# Altium PCB SoM.PcbDoc (part 1 of 5)
Units mm, origin at the board's own origin, x right, y up, seen from the top; angles counter-clockwise.
Board outline 69.6 x 50 mm, 8 copper layers ([1] Signal HS-H, [2] GND, [3] Signal HS-V, [4] GND, [5] POWER, [6] Signal H, [7] GND, [8] Signal V), stack 1.601 mm thick; 537 components, 538 nets, 5734 pads, 0 vias.
Unrouted connection lines stored in the file: 2195.
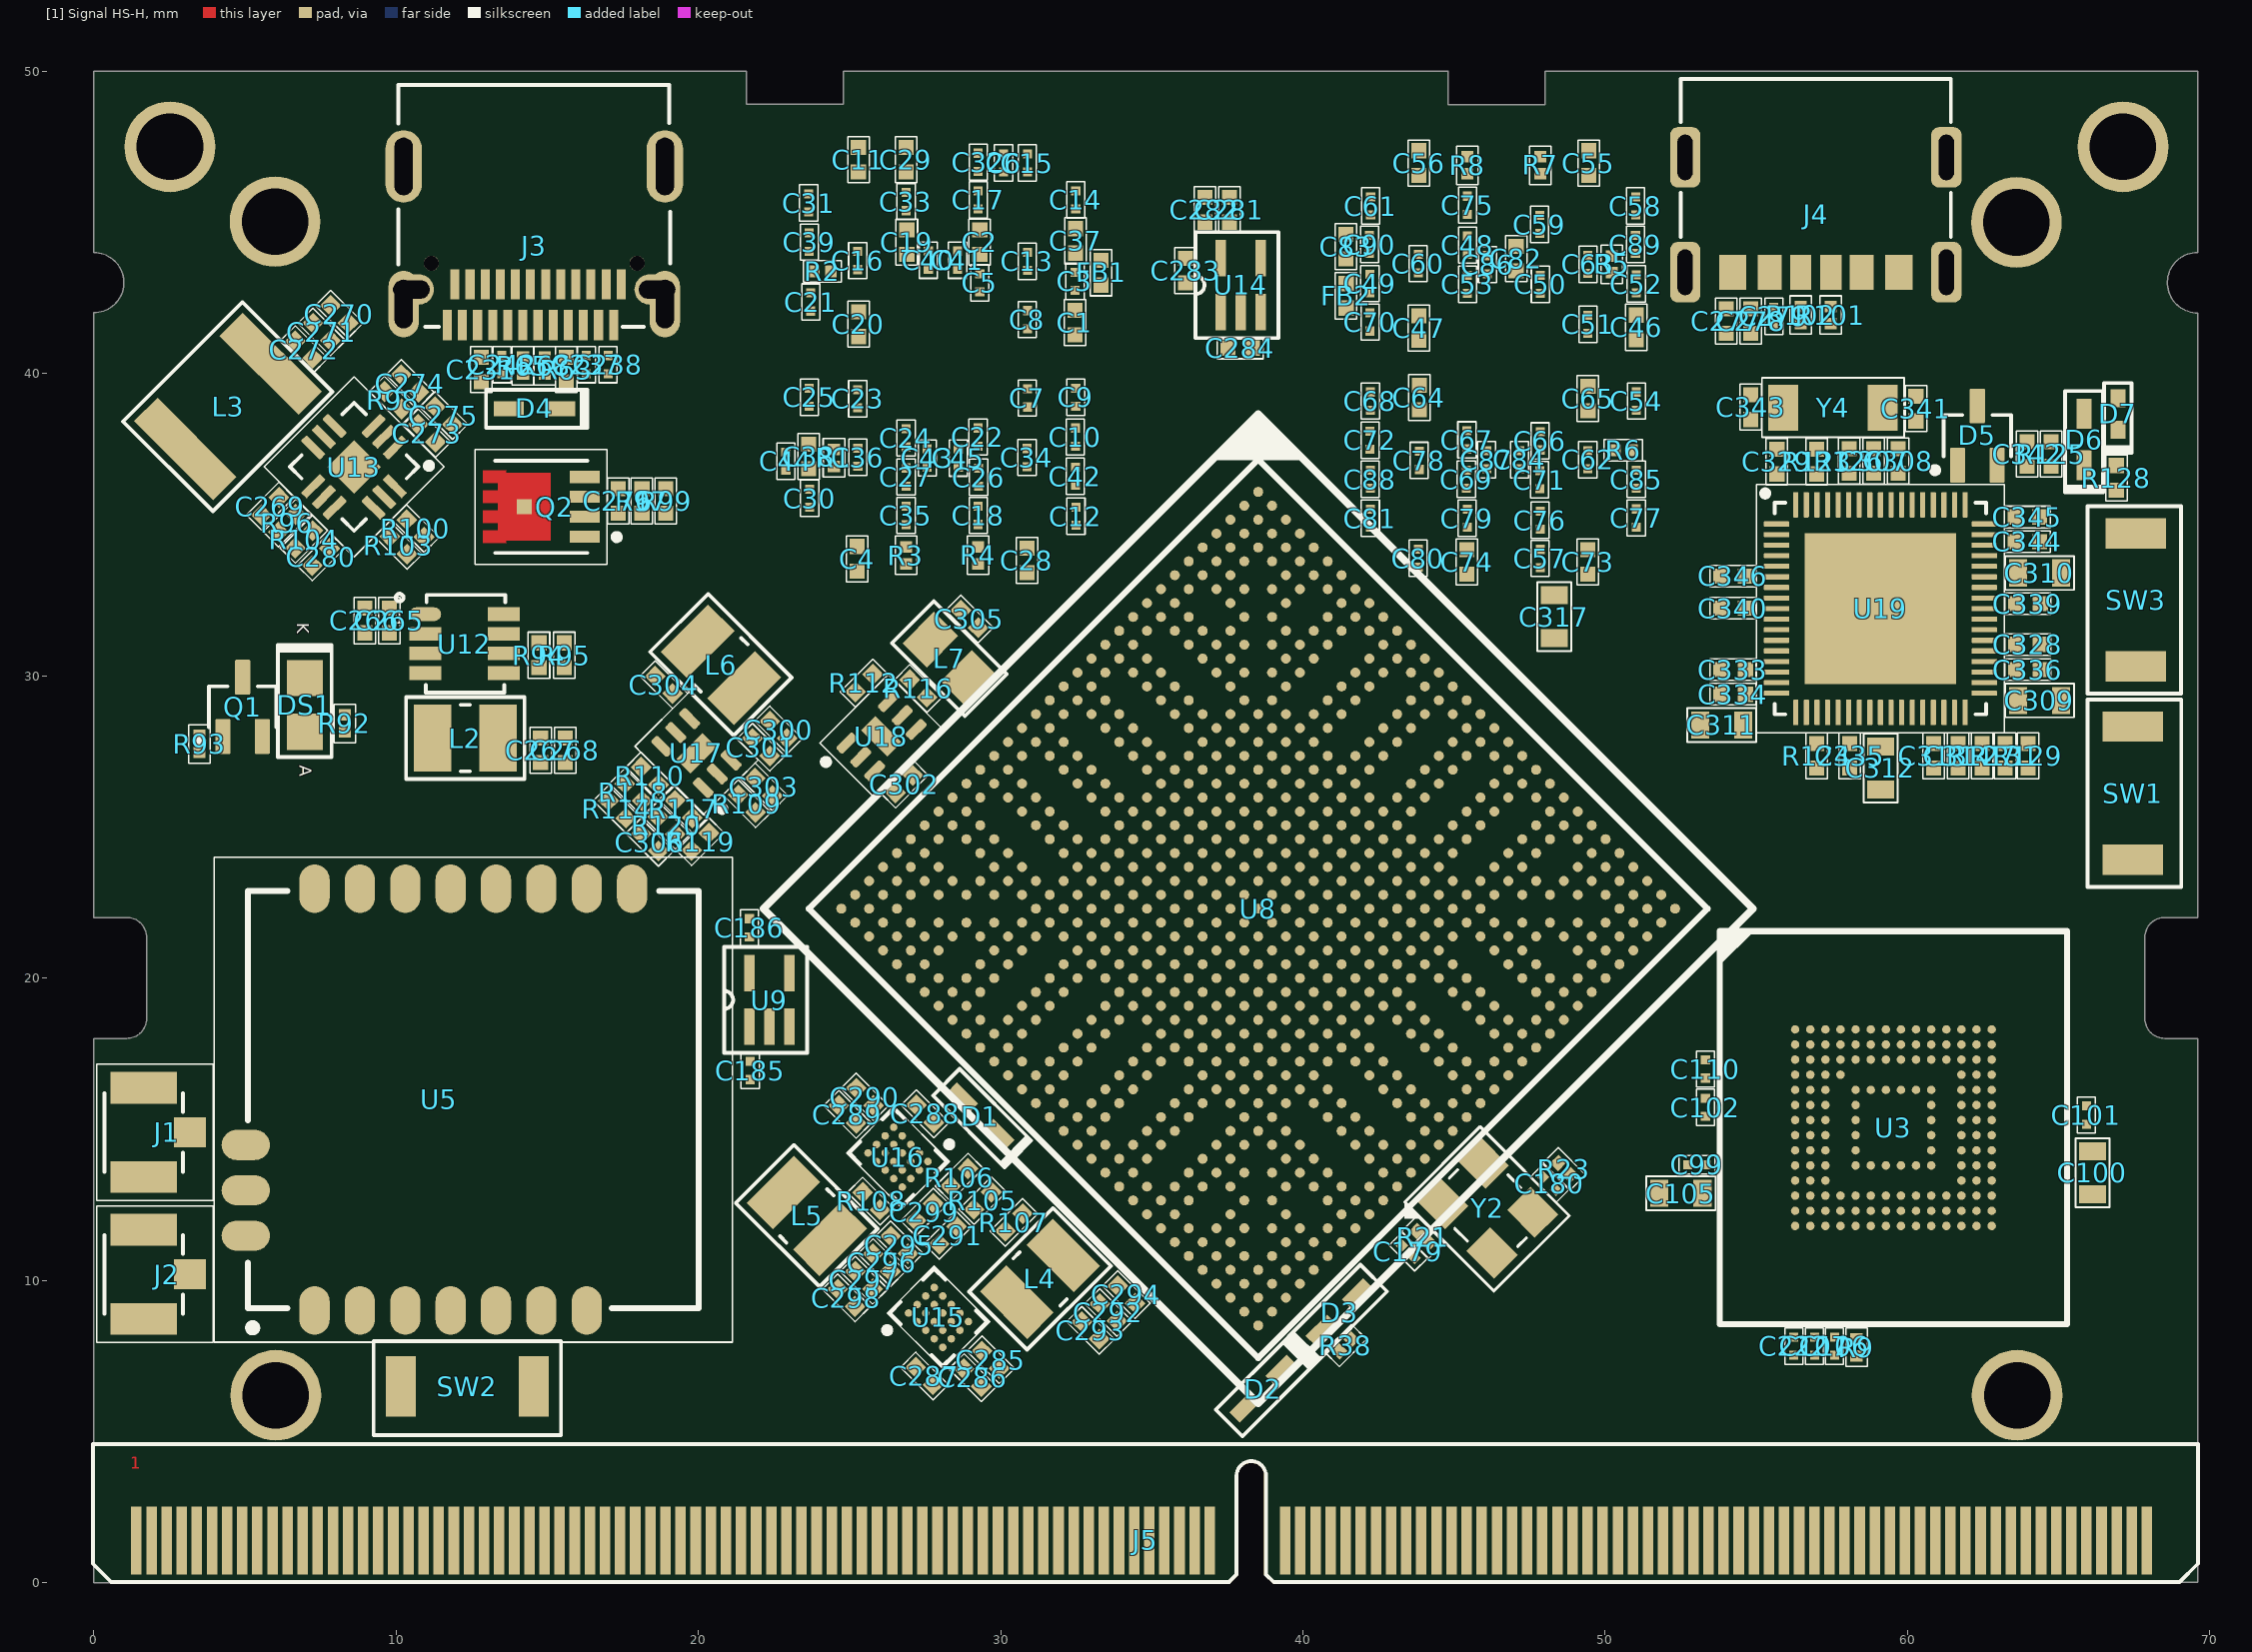
[diagram p0: [1] Signal HS-H view]
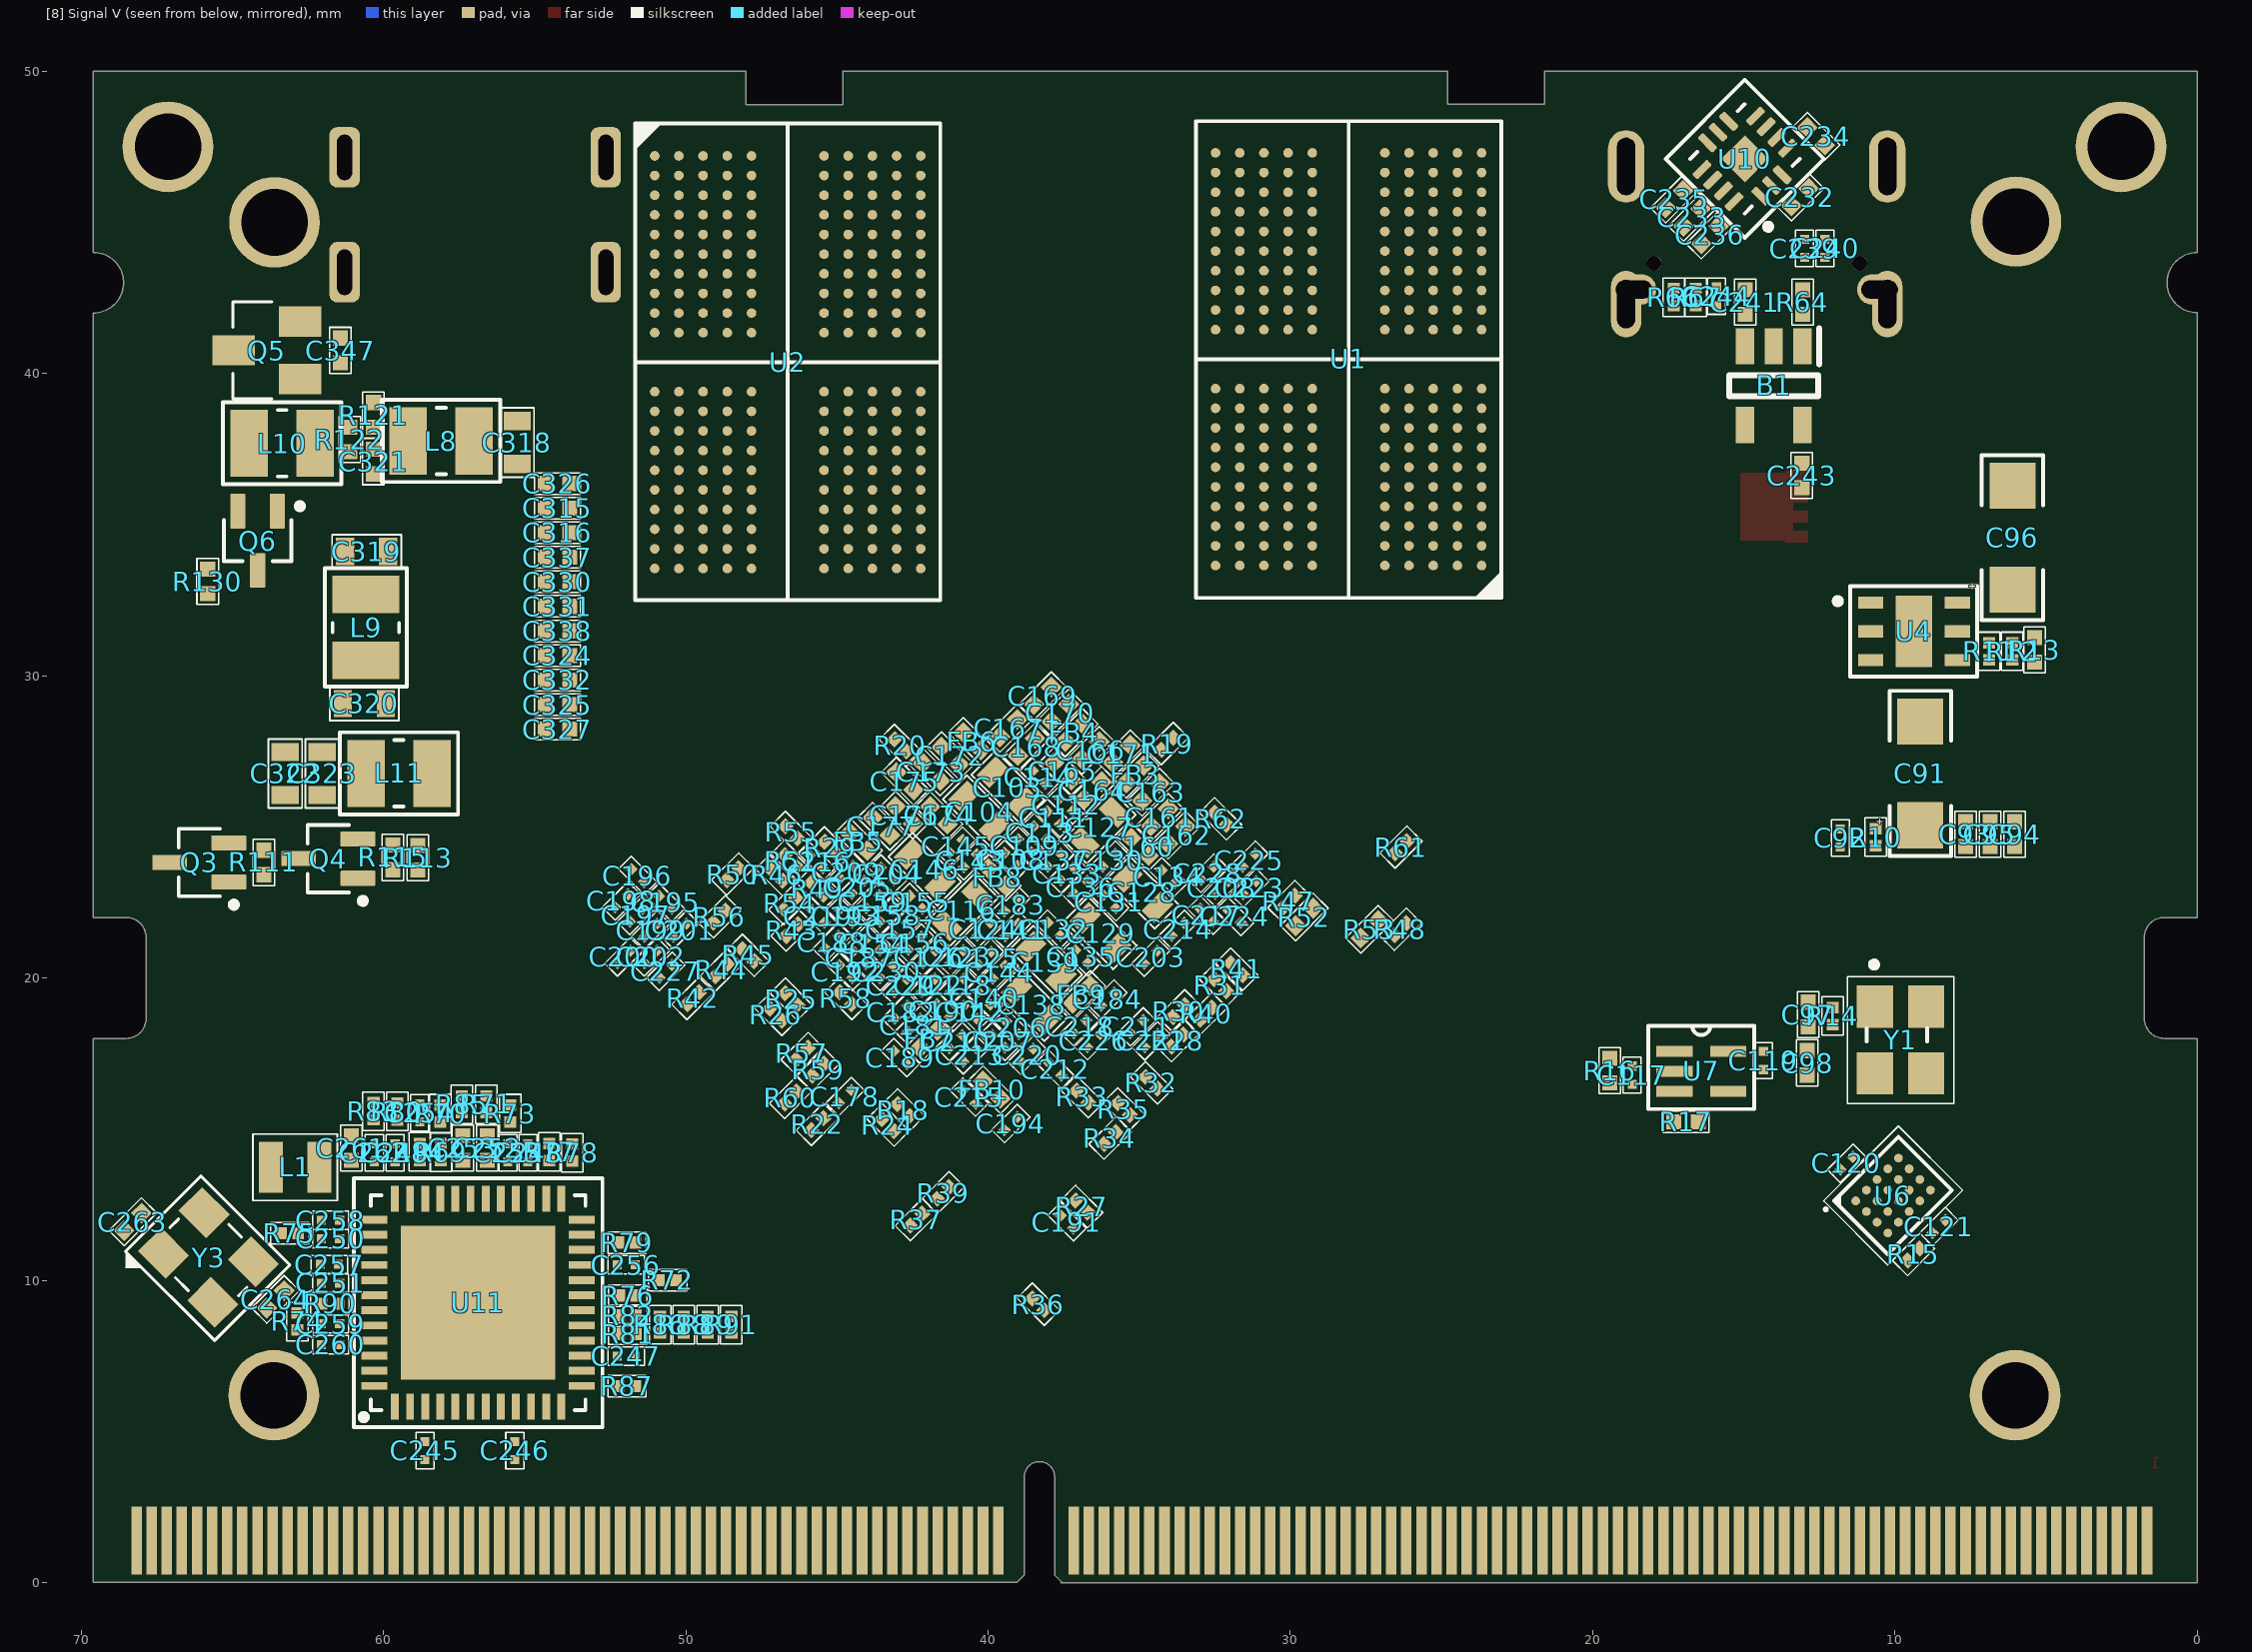
[diagram p1: [8] Signal V view, seen from below]
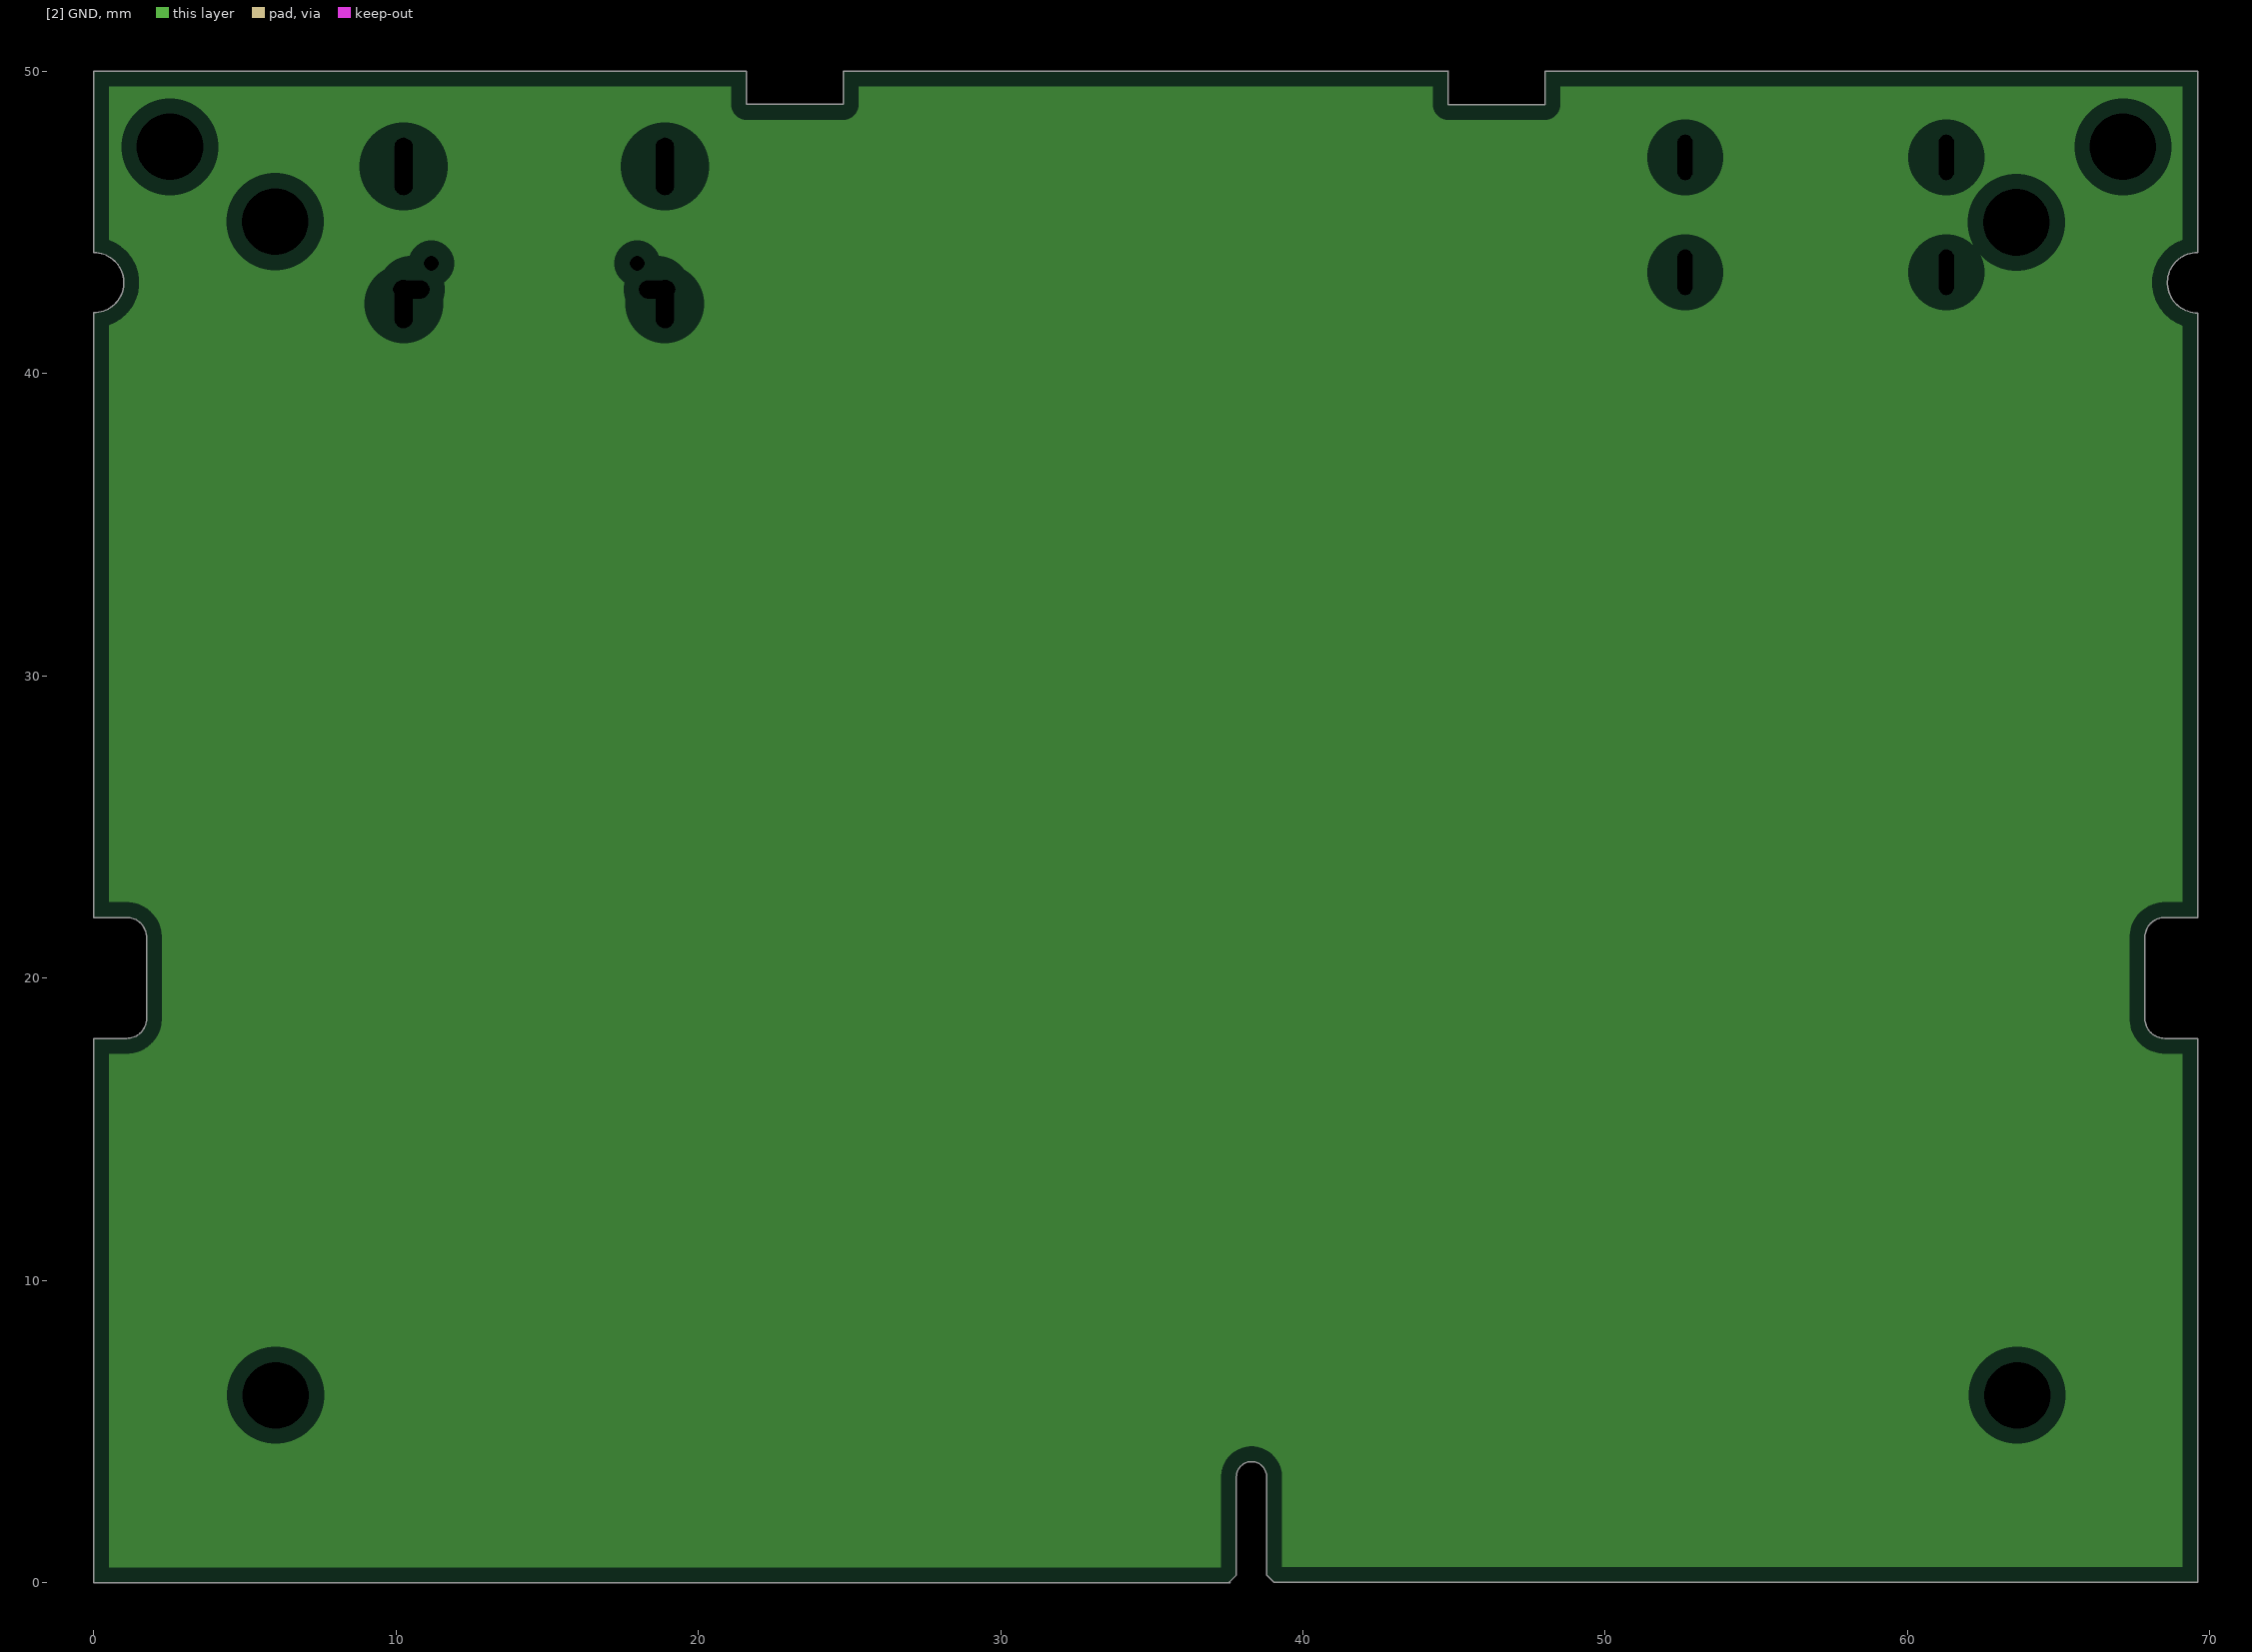
[diagram p2: [2] GND, clearances drawn from the general rule]
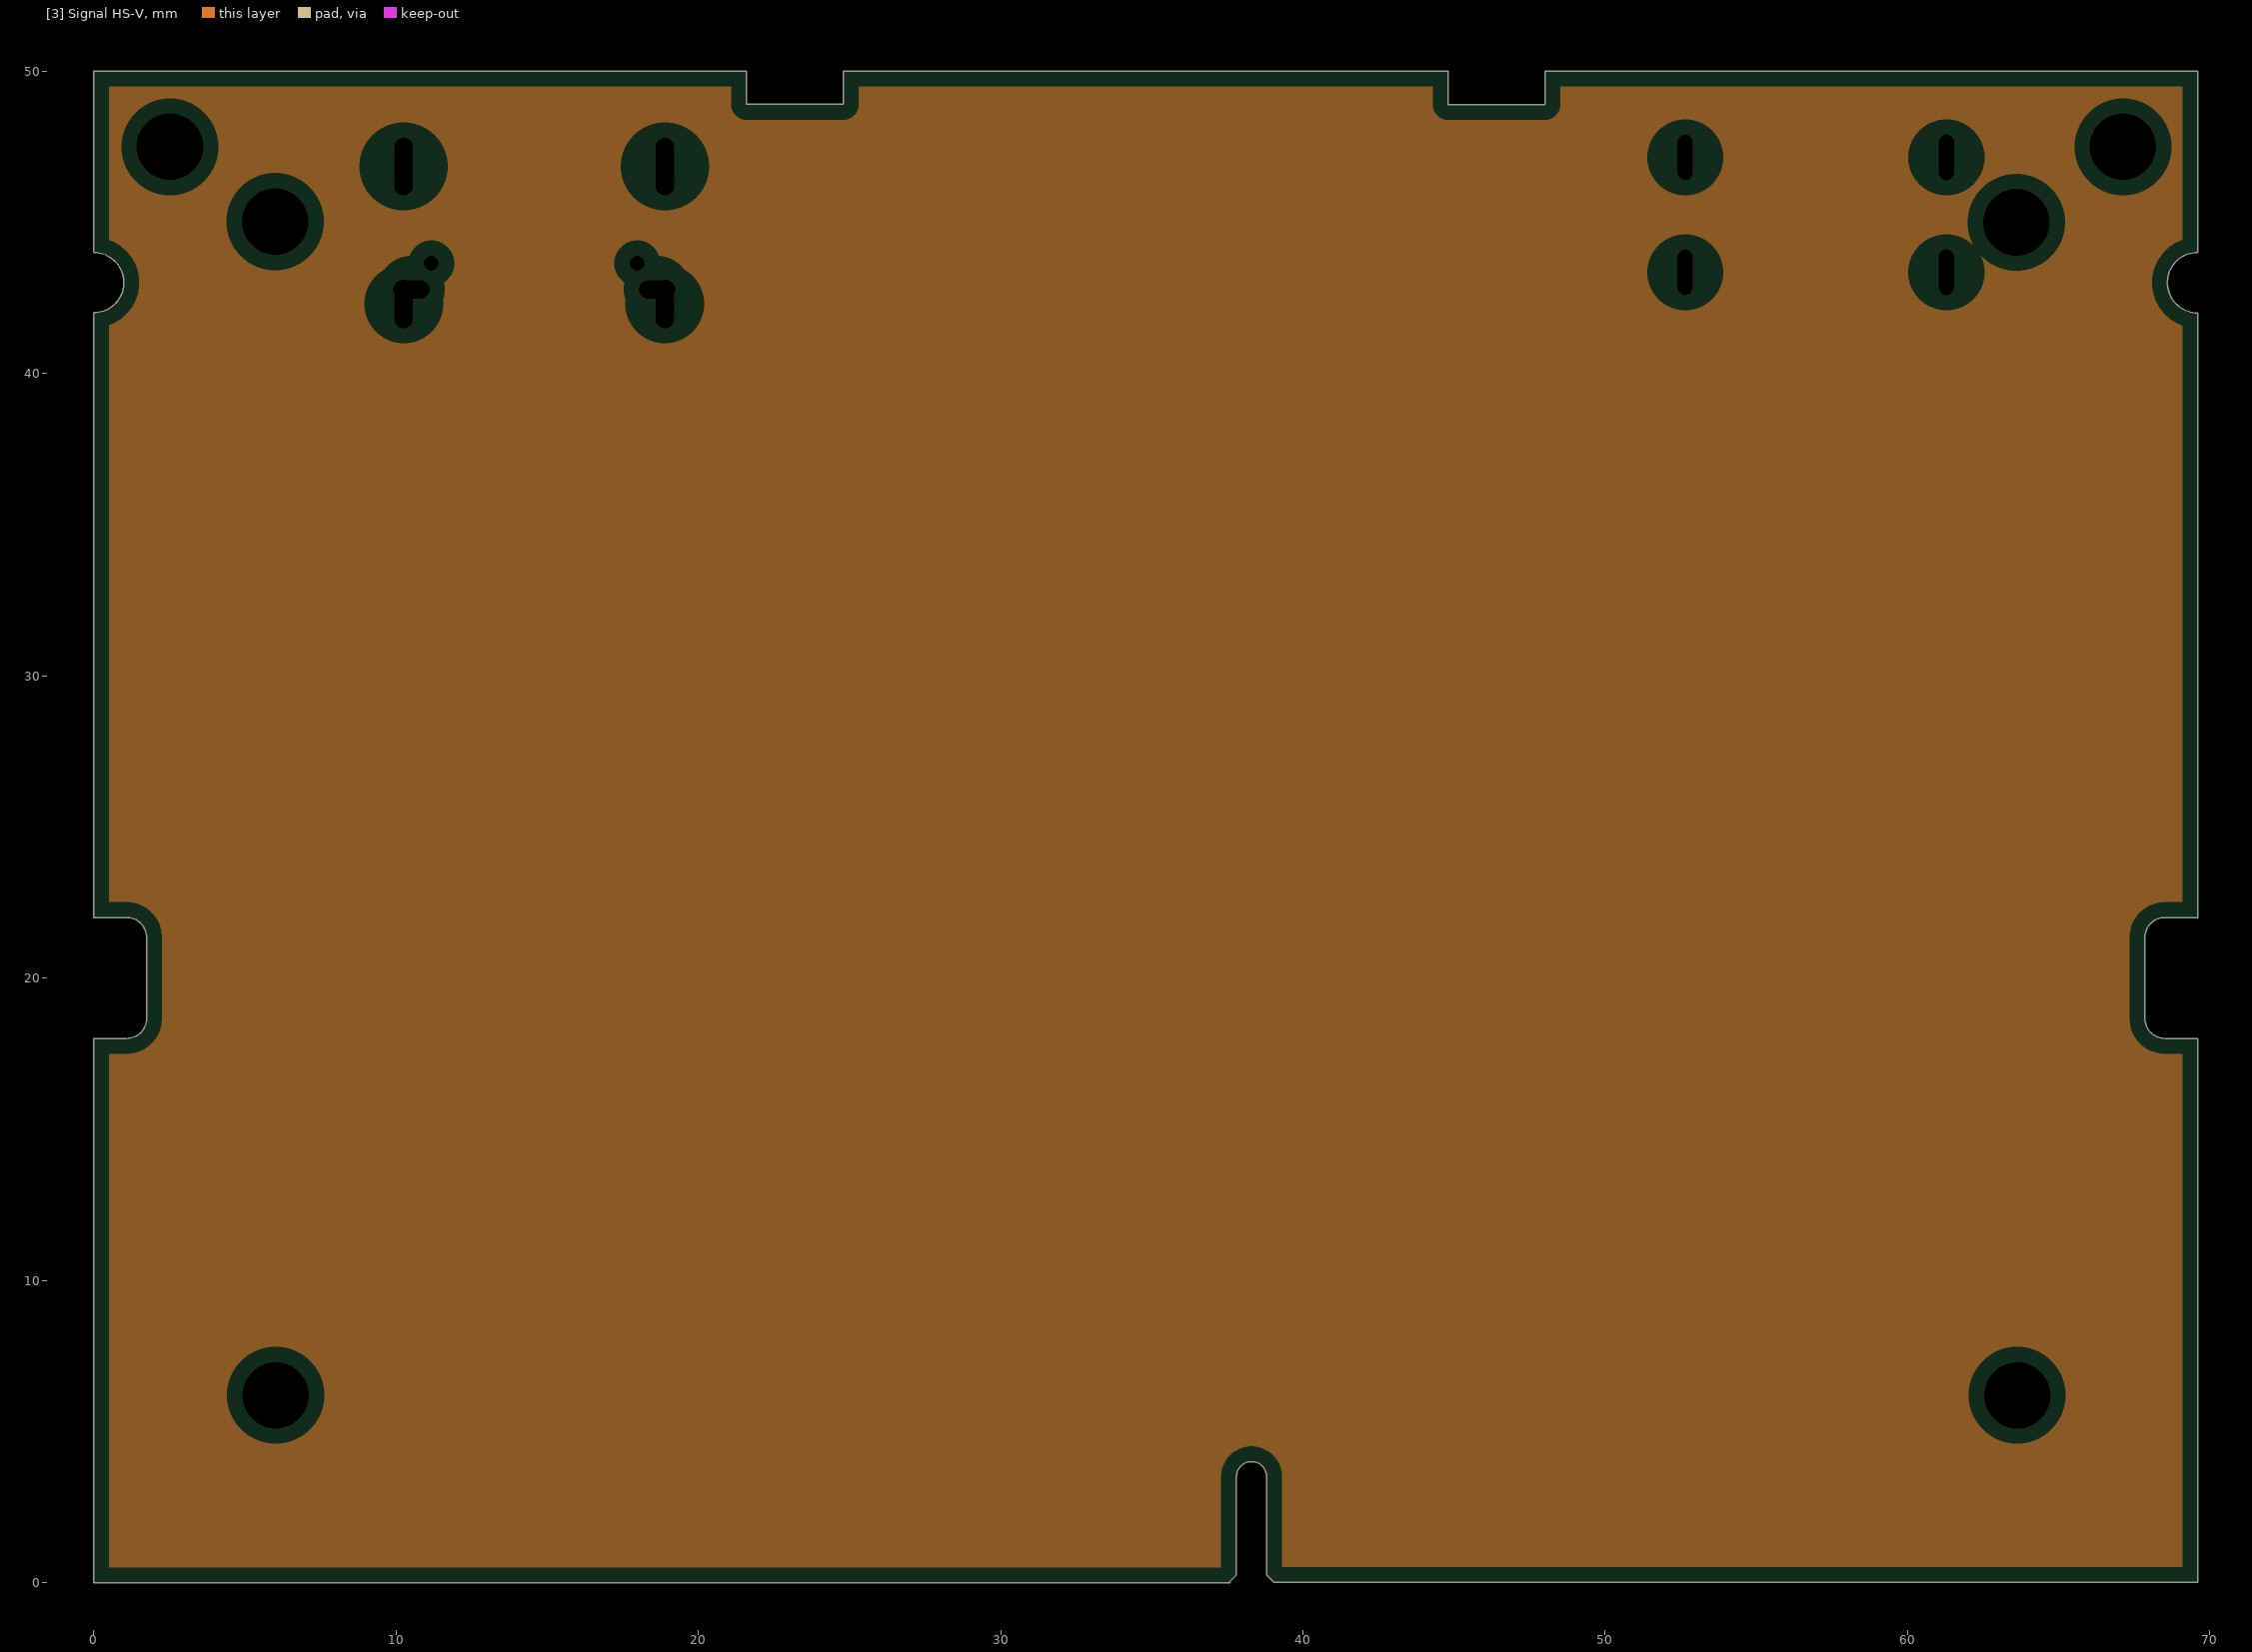
[diagram p3: [3] Signal HS-V, clearances drawn from the general rule]
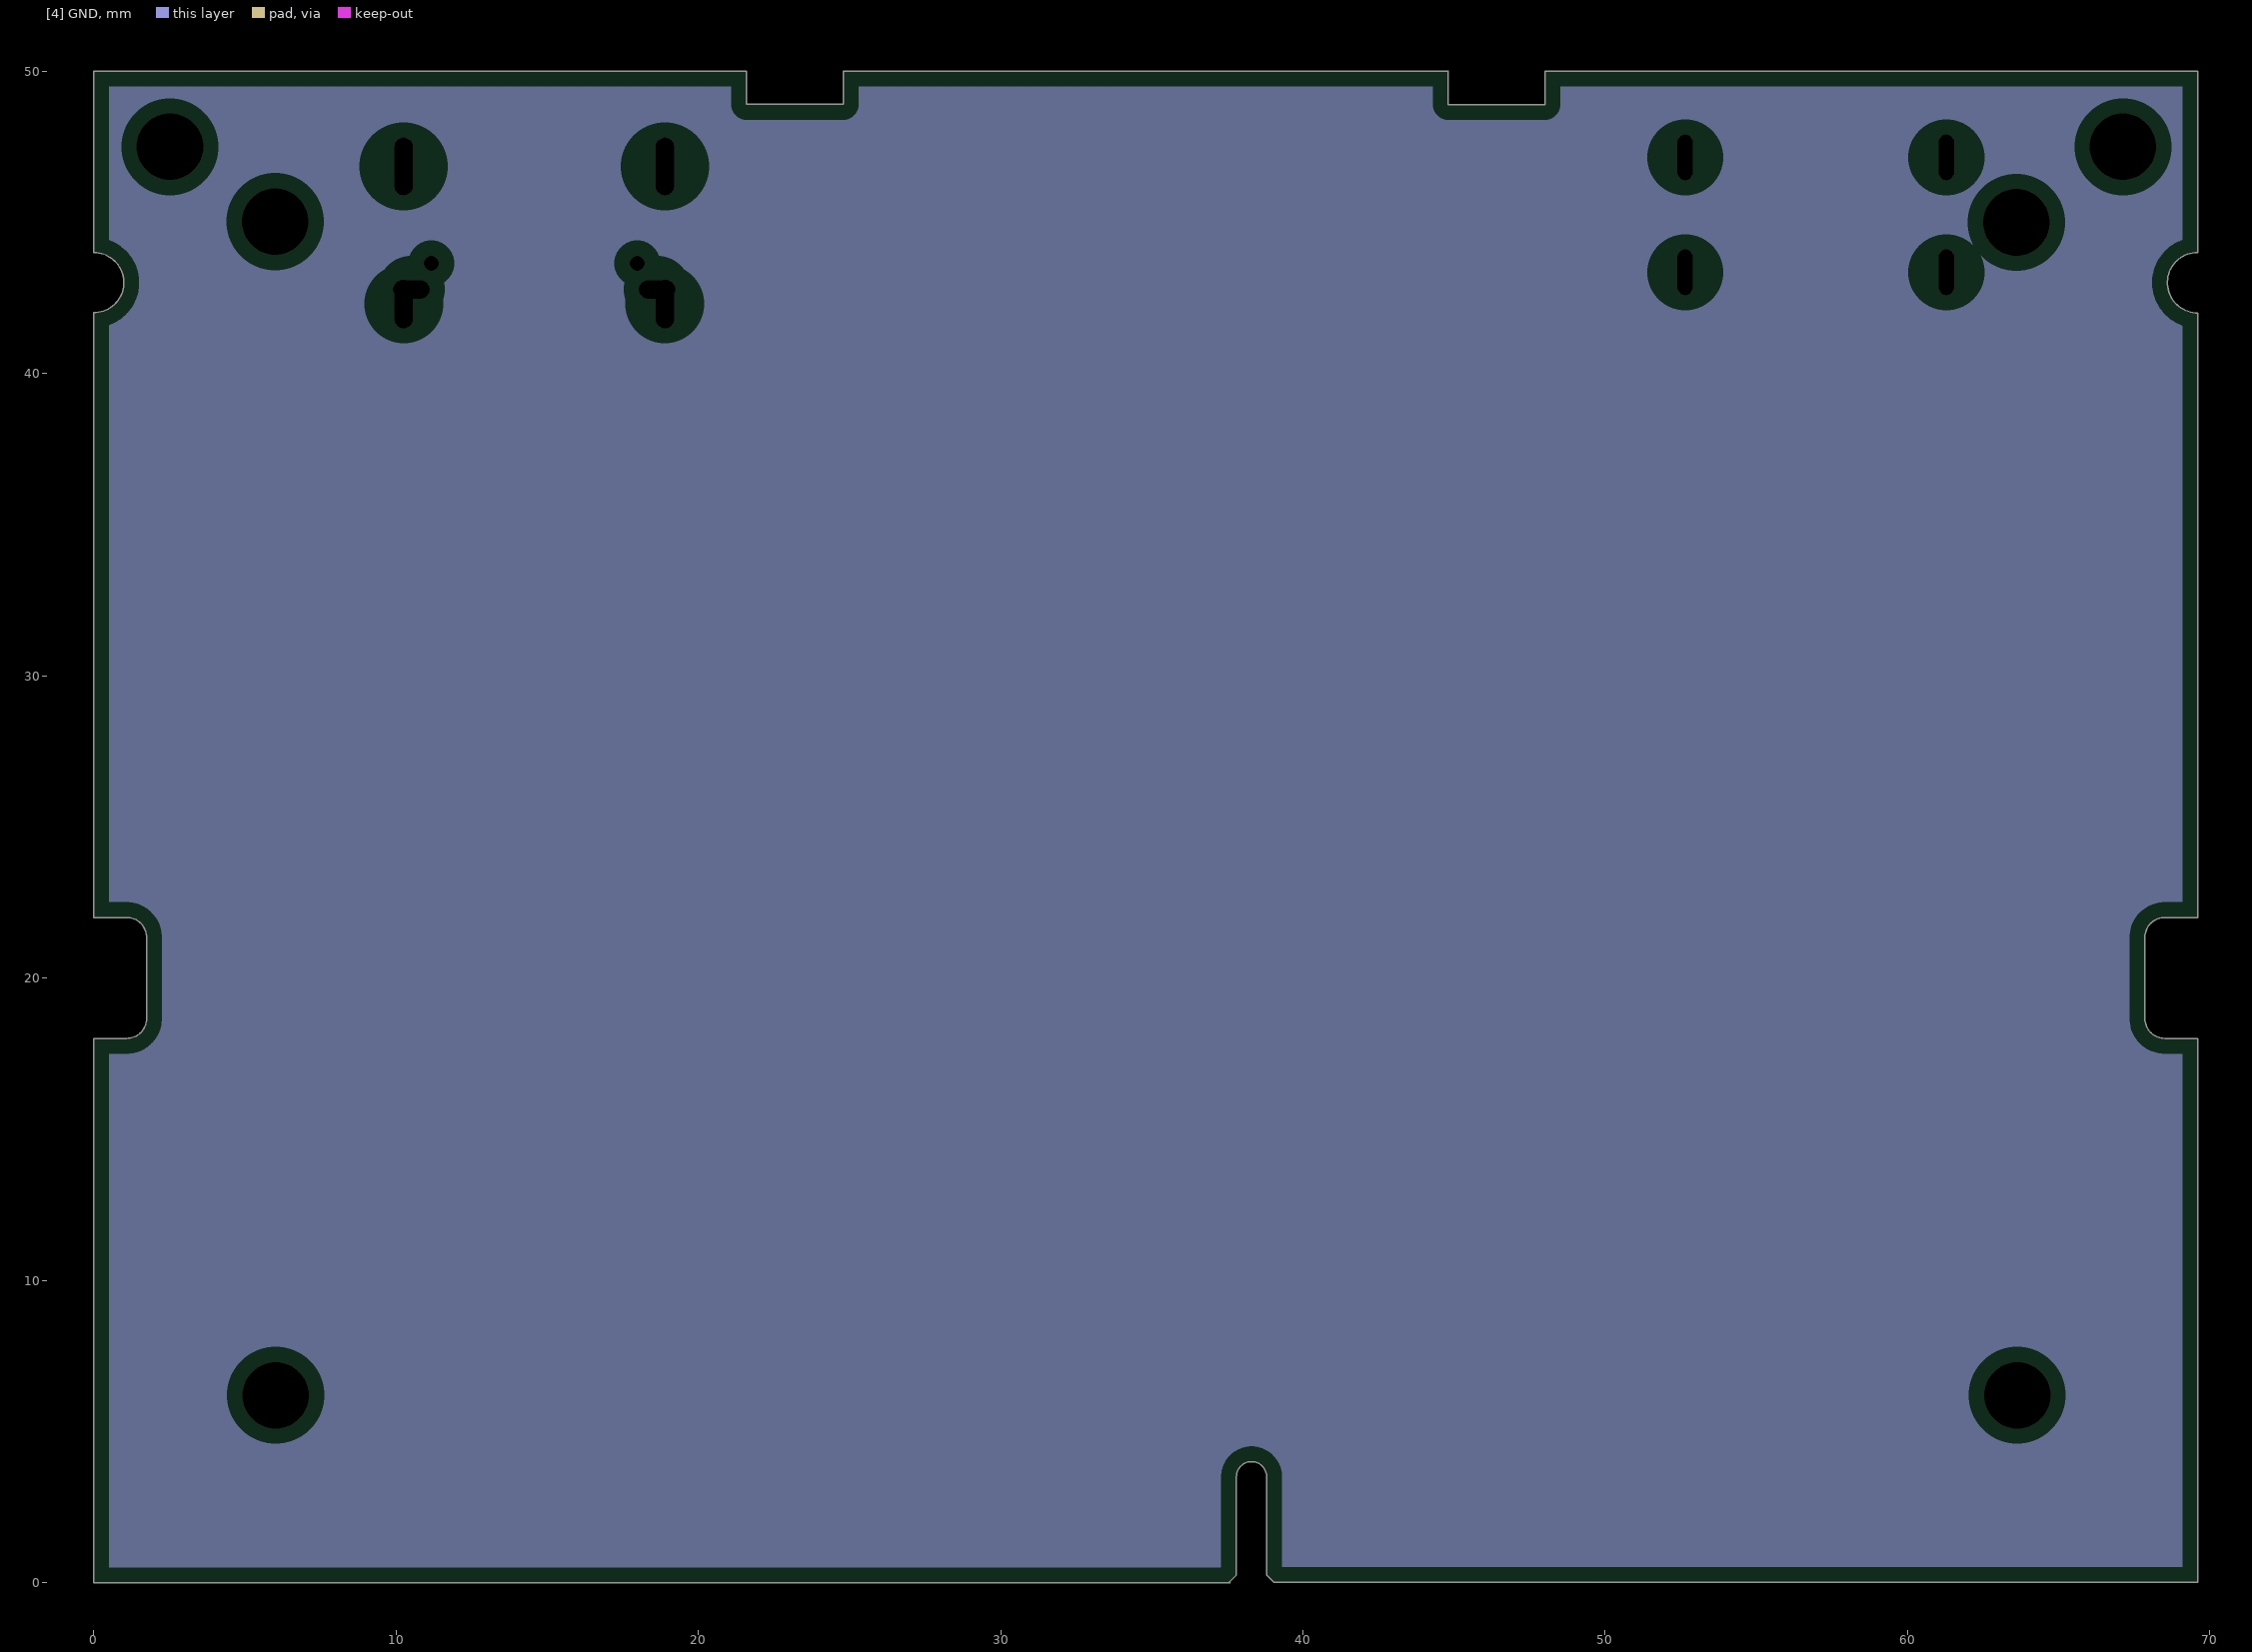
[diagram p4: [4] GND, clearances drawn from the general rule]
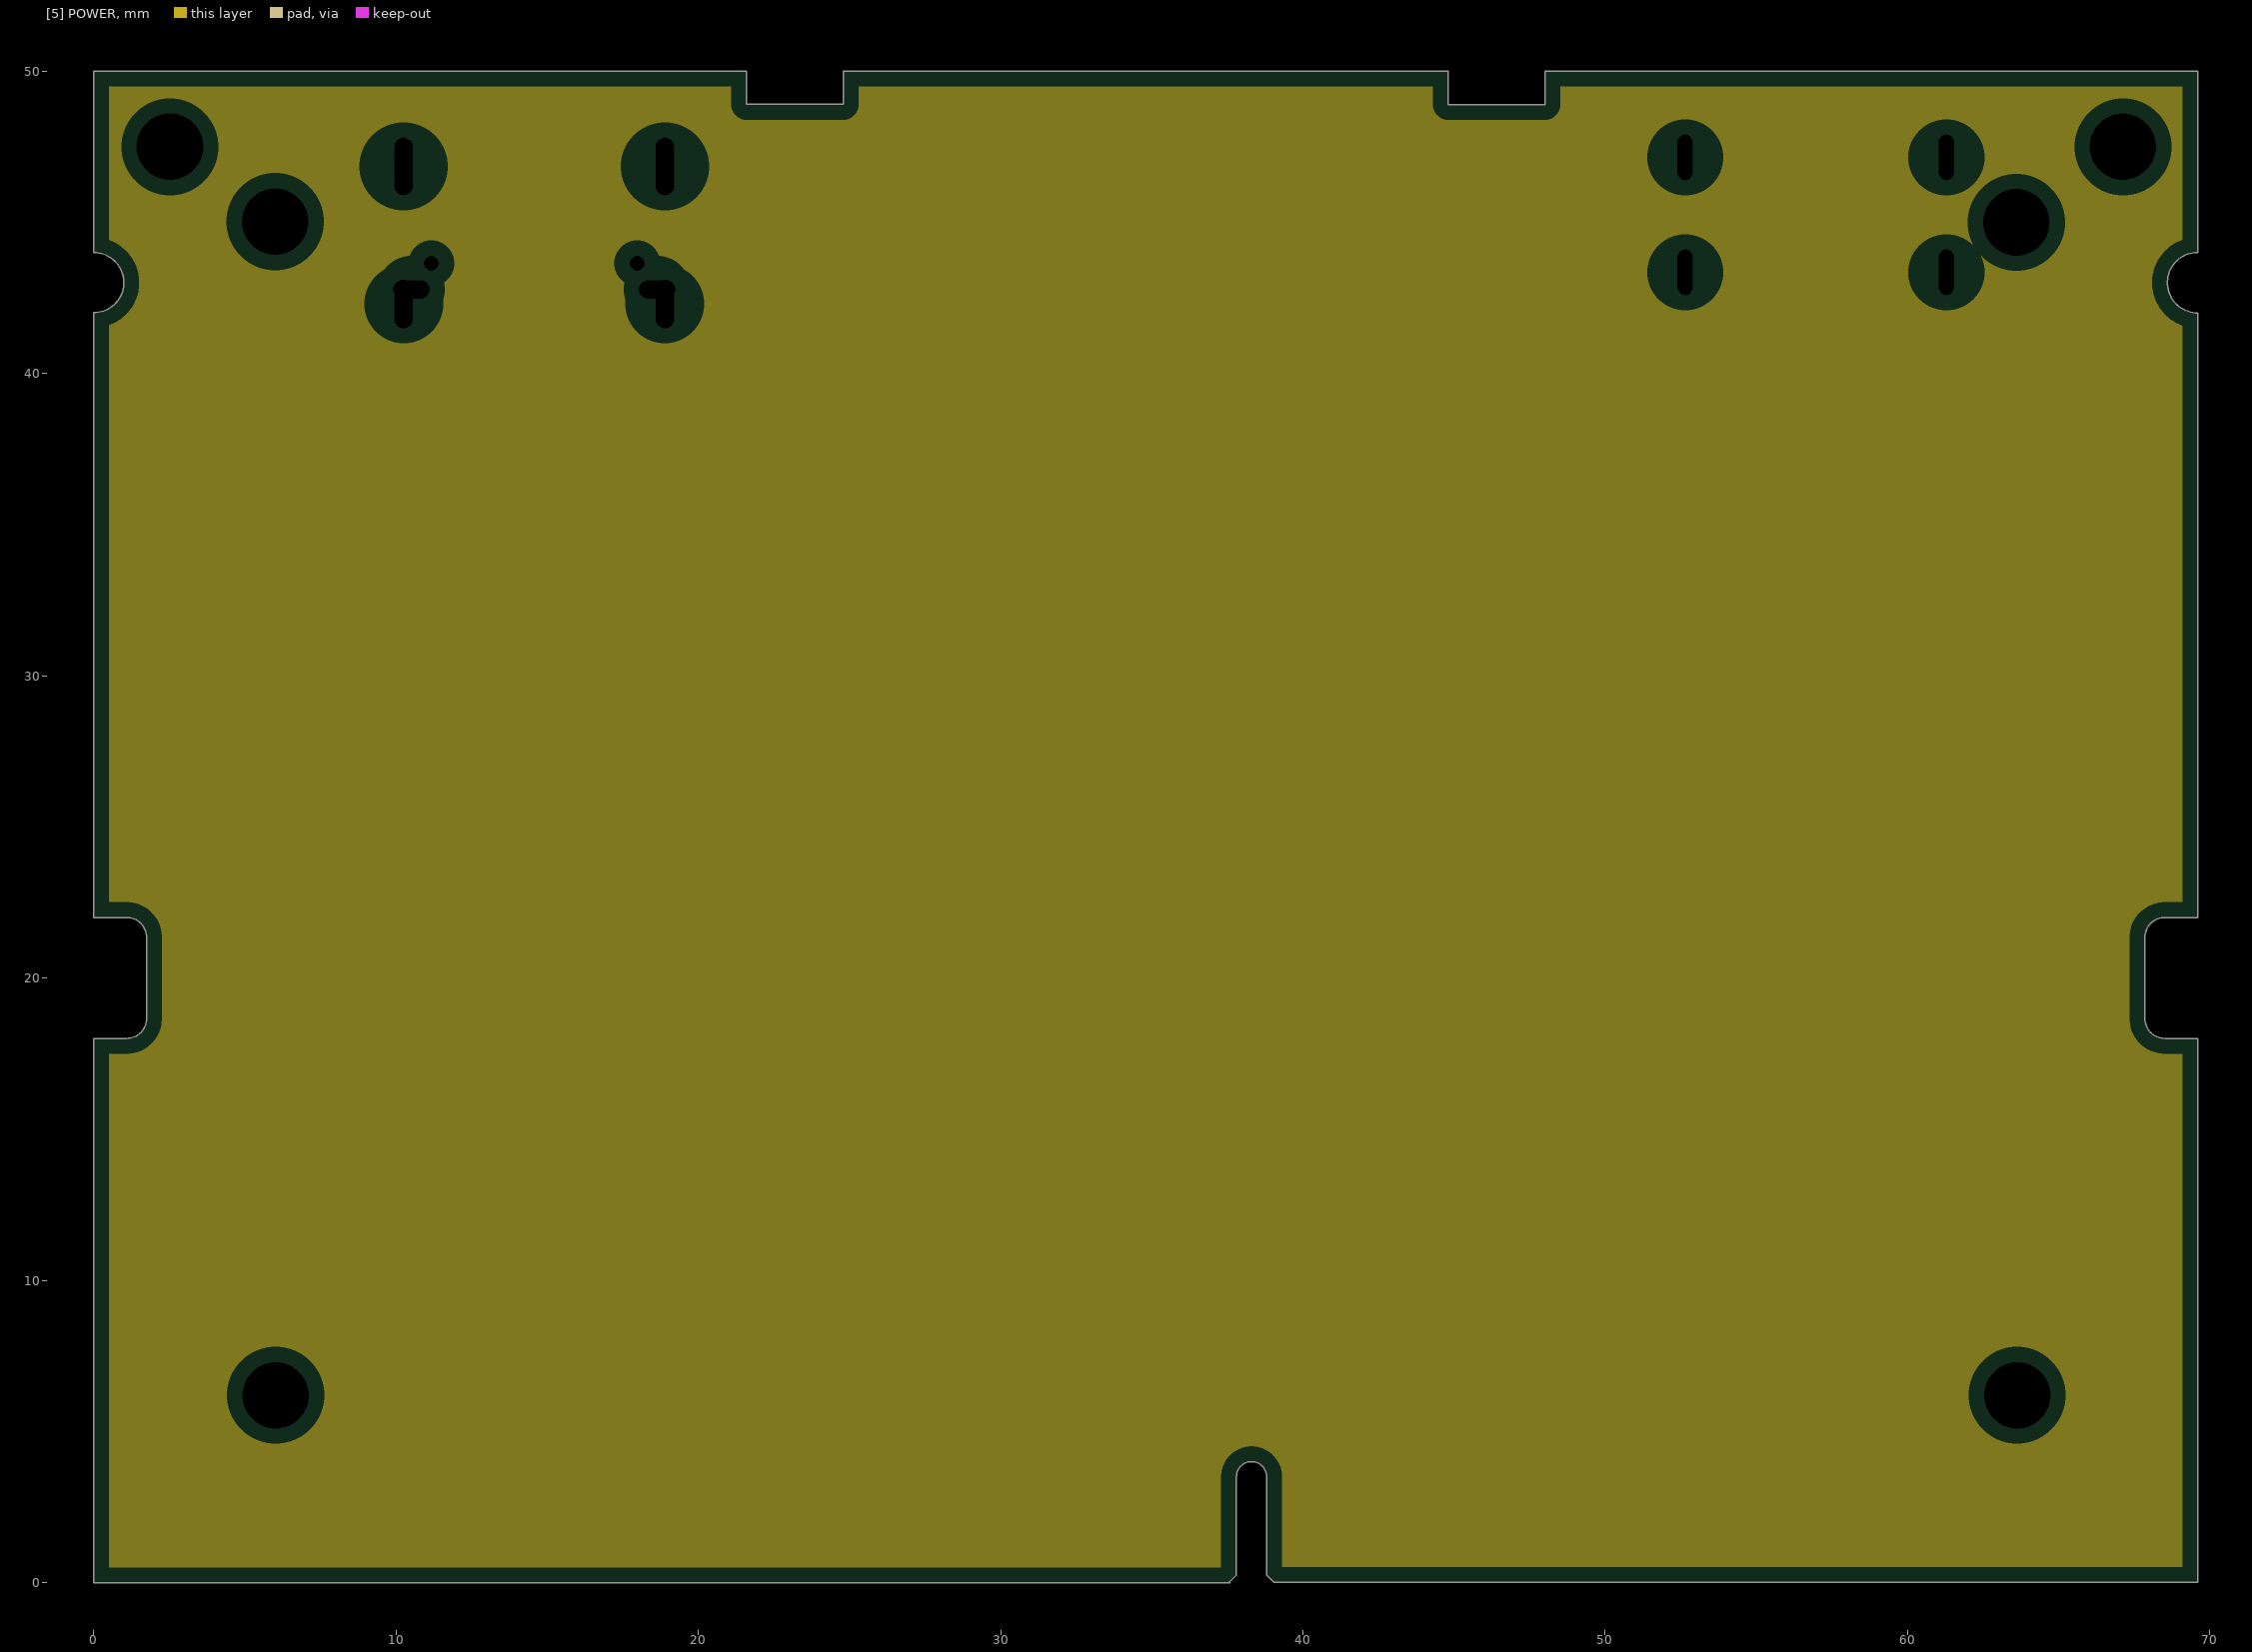
[diagram p5: [5] POWER, clearances drawn from the general rule]
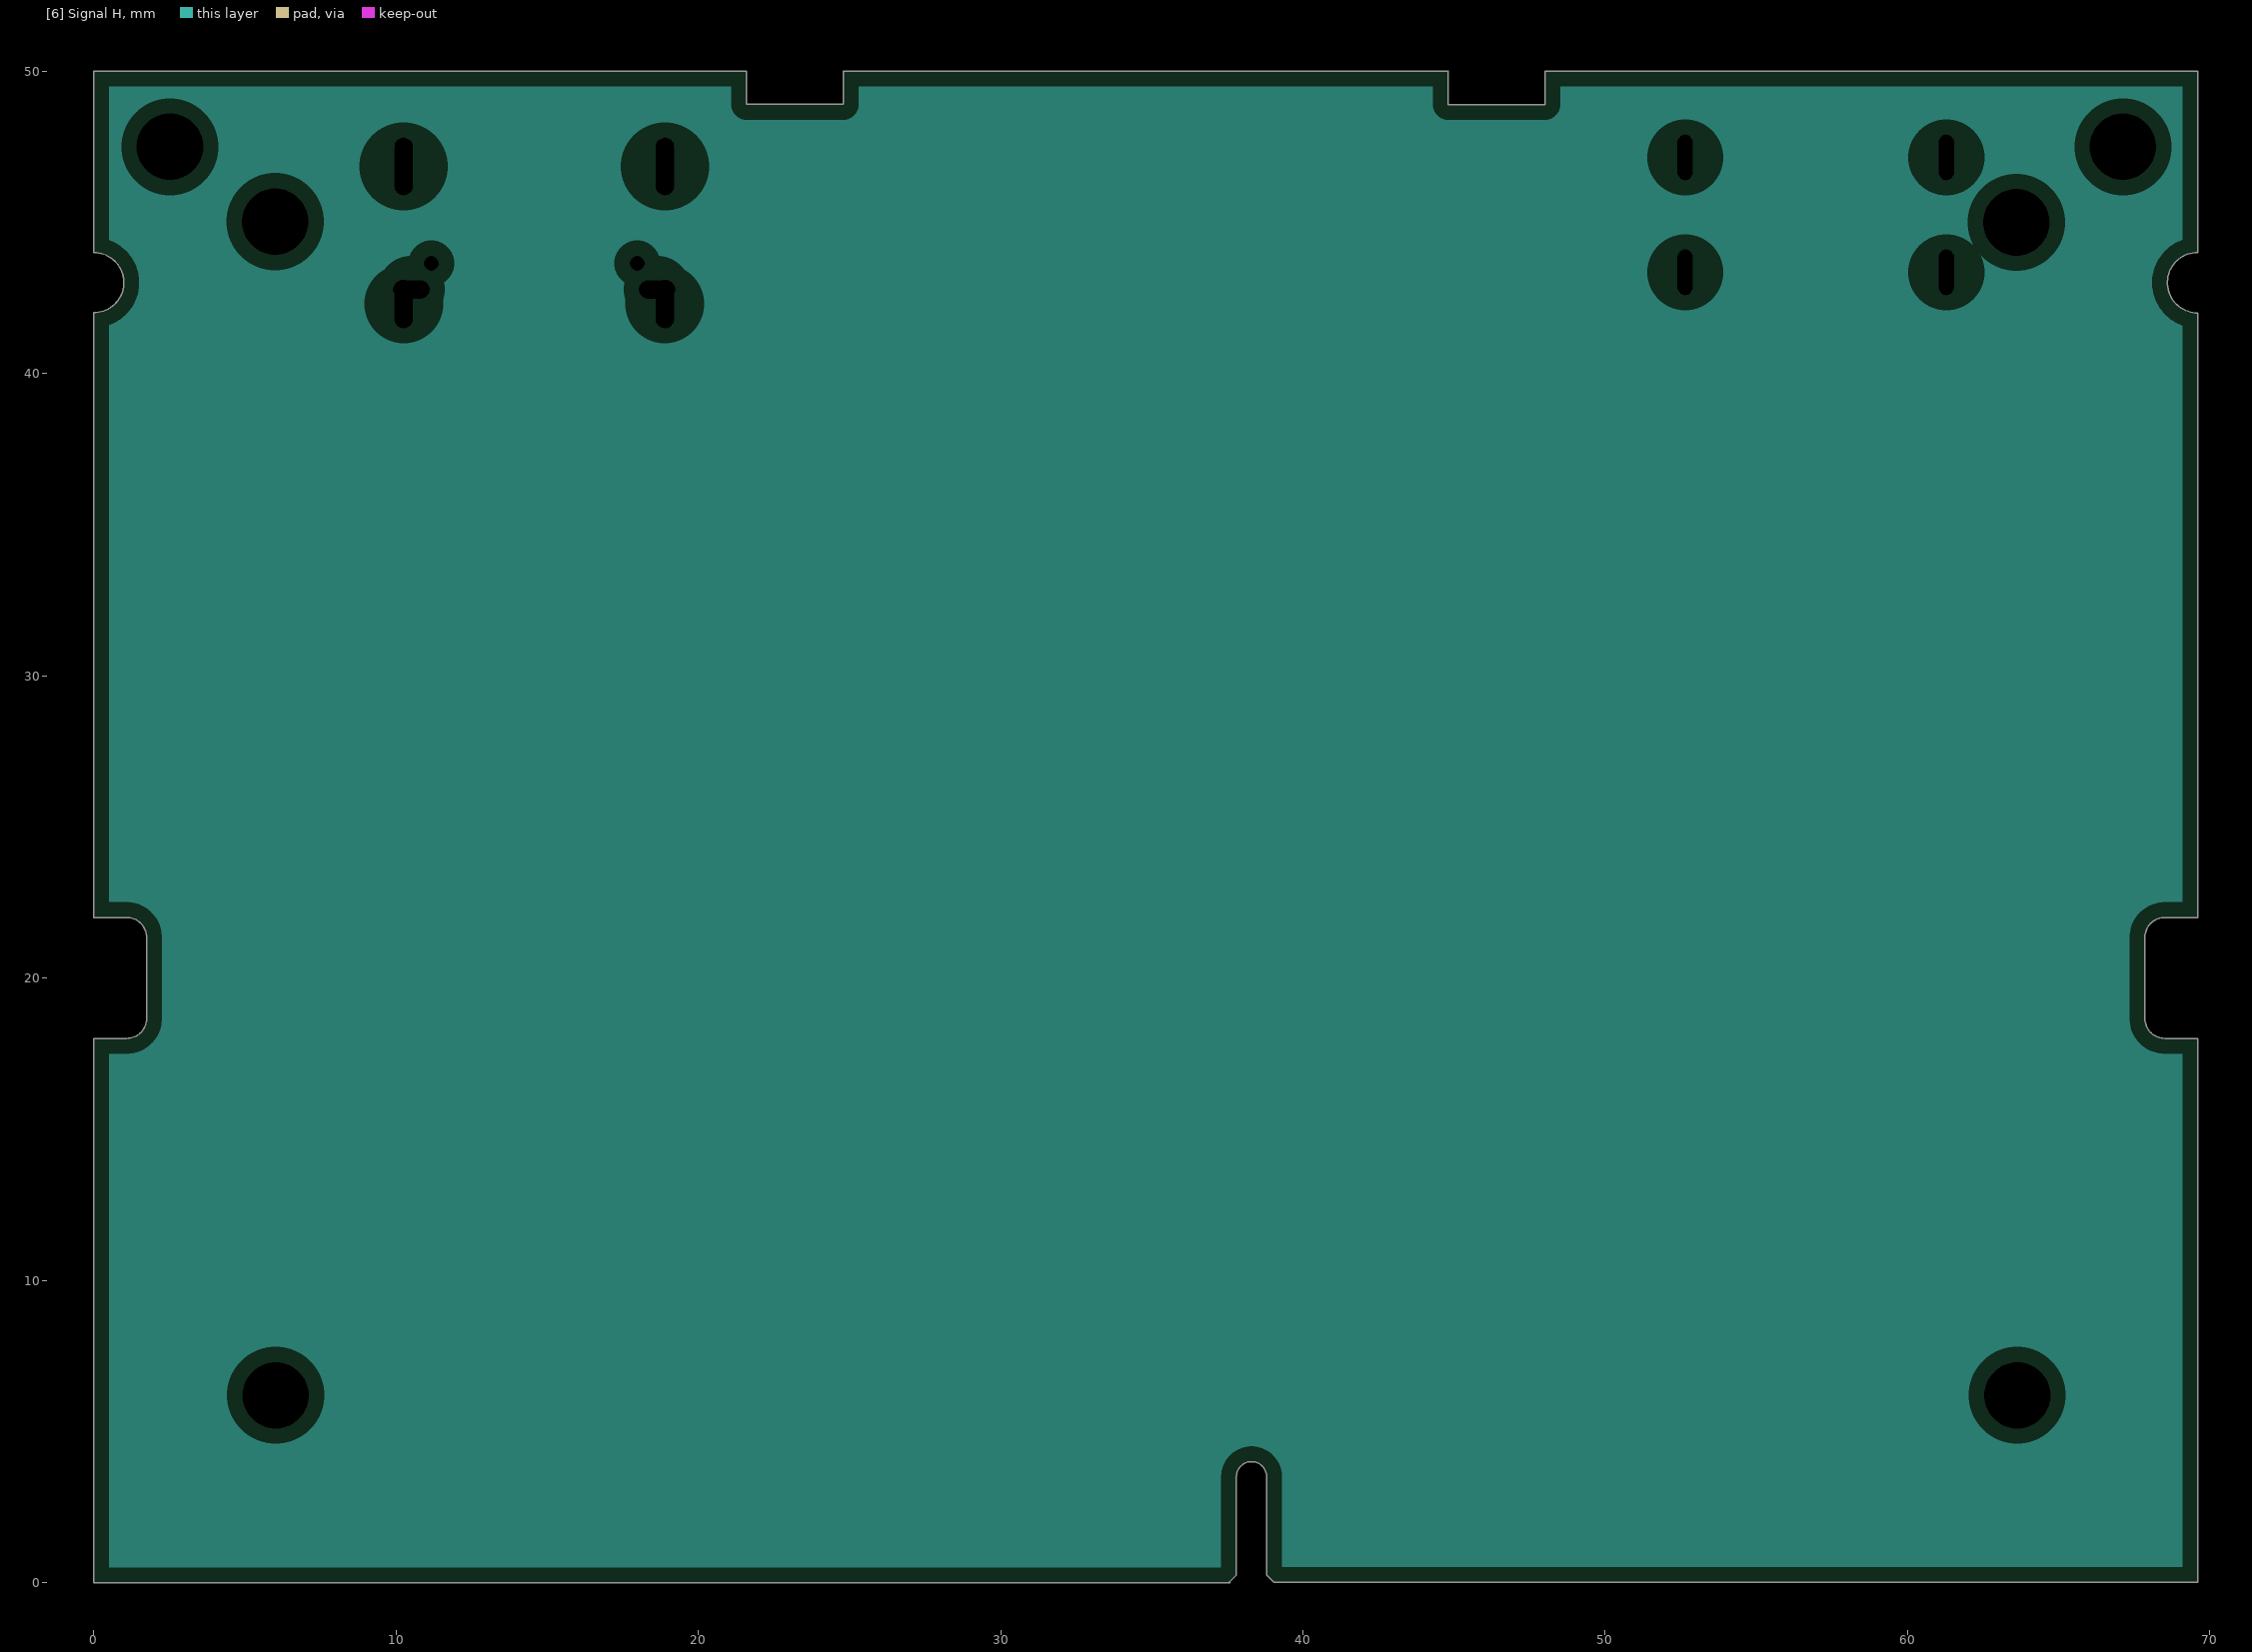
[diagram p6: [6] Signal H, clearances drawn from the general rule]
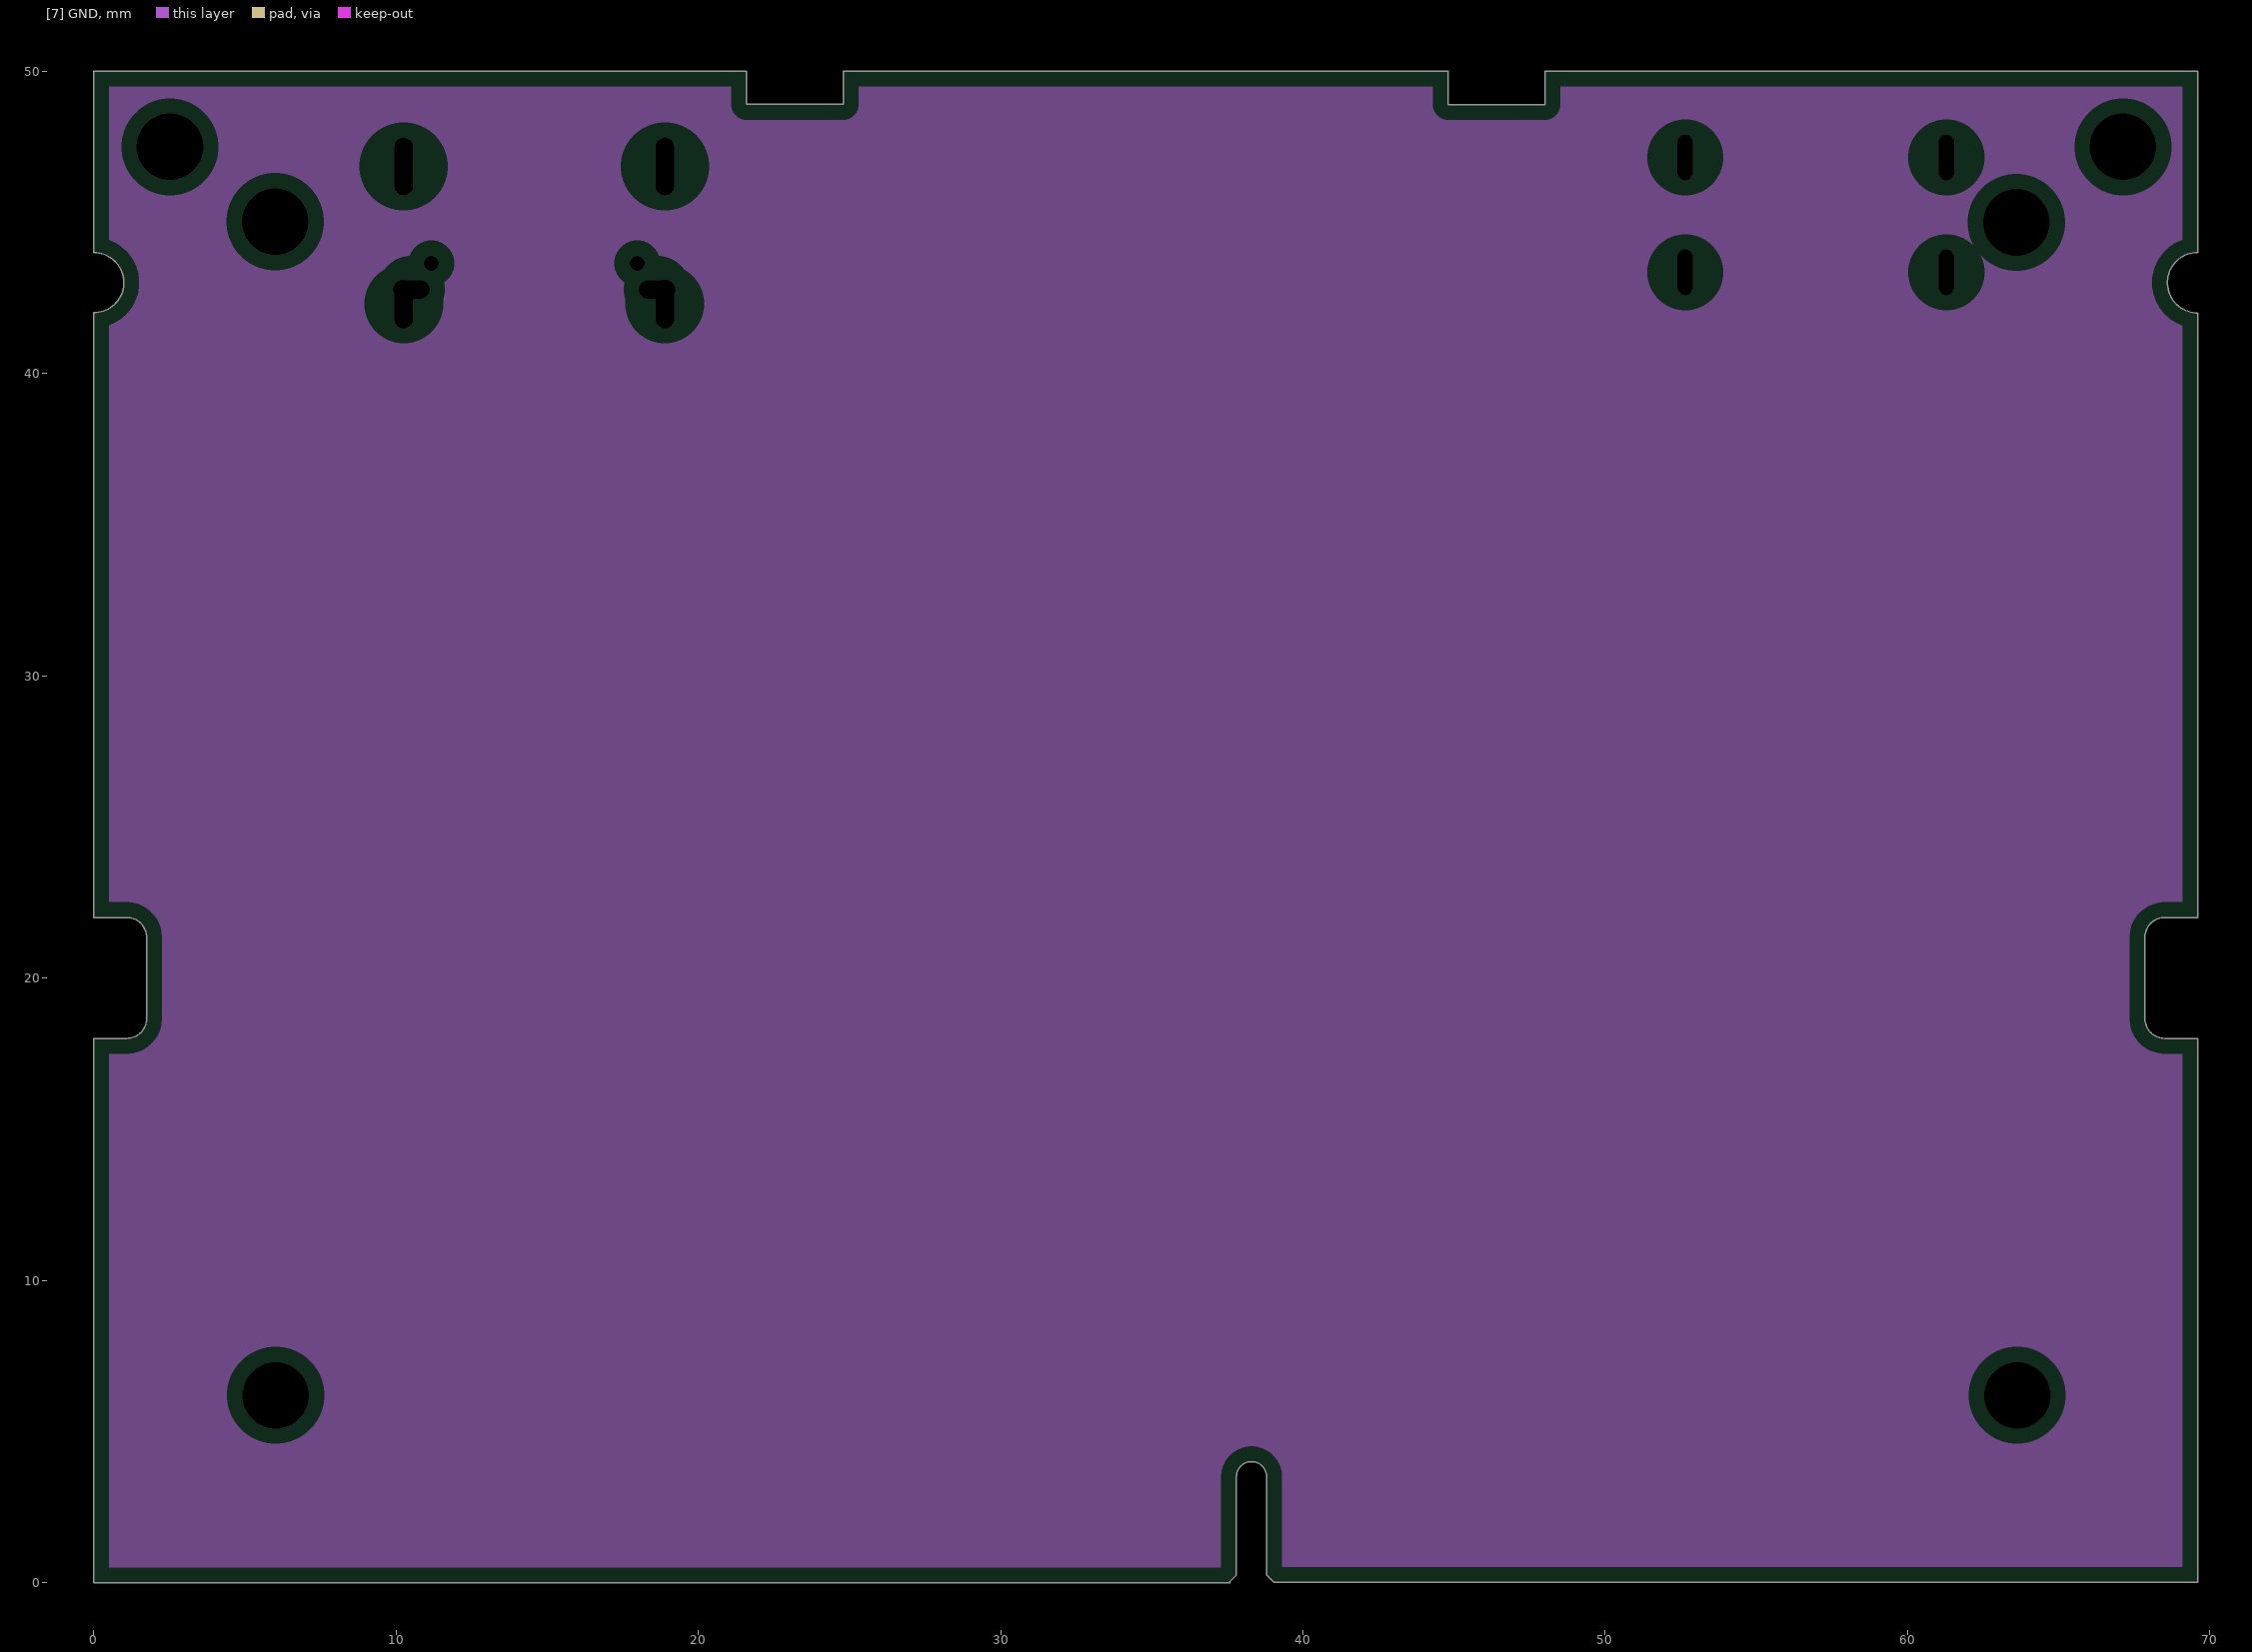
[diagram p7: [7] GND, clearances drawn from the general rule]

## Layer stack, top to bottom
Top Solder: solder mask 0.0102, Solder Resist, Dk 3.5
[1] Signal HS-H: signal copper 0.0356
Dielectric 2: prepreg 0.1168, PP-016, Dk 4.4
[2] GND: plane copper 0.0152
Dielectric 4: core 0.3, Core-030, Dk 4.3
[3] Signal HS-V: plane copper 0.015
Dielectric 6: prepreg 0.0764, PP-006, Dk 4.1
Dielectric 5: prepreg 0.0764, PP-006, Dk 4.1
[4] GND: plane copper 0.015
Dielectric 1: core 0.3, Core-030, Dk 4.3
[5] POWER: plane copper 0.015
Dielectric 9: prepreg 0.0764, PP-006, Dk 4.1
Dielectric 7: prepreg 0.0764, PP-006, Dk 4.1
[6] Signal H: plane copper 0.015
Dielectric 8: core 0.3, Core-030, Dk 4.3
[7] GND: plane copper 0.0152
Dielectric 3: prepreg 0.1168, PP-016, Dk 4.4
[8] Signal V: signal copper 0.0356
Bottom Solder: solder mask 0.0102, Solder Resist, Dk 3.5

## Board outline
0.001,0 0.001,18.004 1.101,18.004 ccw(c1.101,18.654) 1.751,18.654 1.751,21.354 ccw(c1.101,21.354) 1.101,22.004 0.001,22.004 0.001,42.016 ccw(c0.008,43.008) 0.008,44 0.001,44 0.001,49.984 0.021,50.004 21.596,50.004 21.596,48.902 24.799,48.902 24.799,50.004 44.799,50.004 44.801,50.002 44.801,48.894 48.004,48.894 48.004,50.004 69.601,50.004 69.601,44.002 69.589,44.002 ccw(c69.589,43.004) 69.601,42.006 69.601,22.004 68.501,22.004 ccw(c68.501,21.354) 67.851,21.354 67.851,18.654 ccw(c68.501,18.654) 68.501,18.004 69.601,18.004 69.601,0.004 39.051,0.004 38.801,0.254 38.801,3.504 ccw(c38.301,3.504) 38.301,4.004 ccw(c38.301,3.504) 37.801,3.504 37.801,0.254 37.551,0.004 37.592,0

## Design rules (kind name [scope] priority, off if disabled: settings)
BoardOutlineClearance [All] p1: gap=0.5 ignorepadtopadclearanceinfootprint=FALSE
Clearance Clearance_connector [WithinRoom('RoomDefinition_connector')] p1: gap=0.254 ignorepadtopadclearanceinfootprint=FALSE except(0.09: Arc-Arc Arc-Track Track-Track; 0.103: Arc-SMDPad Track-SMDPad SMDPad-SMDPad; 0.127: Arc-Via Track-Via SMDPad-Via; 0.15: SMDPad-Fill SMDPad-Poly SMDPad-Region; 0.203: Arc-Fill Arc-Poly Arc-Region Arc-Hole Track-Fill Track-Poly Track-Region Track-Hole Via-Via Via-Fill Via-Poly Via-Region Fill-Fill Fill-Poly Fill-Region Poly-Poly Poly-Region Region-Region; 0.35: SMDPad-THPad THPad-THPad THPad-Via THPad-Text THPad-Hole)
Clearance [All] p2: gap=0.254 ignorepadtopadclearanceinfootprint=FALSE except(0.09: Arc-Arc Arc-Track Track-Track; 0.127: Arc-SMDPad Arc-Via Track-SMDPad Track-Via SMDPad-Via; 0.152: SMDPad-SMDPad; 0.203: Arc-Fill Arc-Poly Arc-Region Track-Fill Track-Poly Track-Region Via-Fill Via-Poly Via-Region Fill-Fill Fill-Poly Fill-Region Poly-Poly Poly-Region Region-Region; 0.25: Via-Via; 0.3: SMDPad-Fill SMDPad-Poly SMDPad-Region THPad-Fill THPad-Poly THPad-Region; 0.35: SMDPad-THPad THPad-THPad THPad-Via THPad-Text THPad-Hole)
DiffPairsRouting [All] p1: maxlimit=0.22 minlimit=0.22 mostfreqgap=0.22 toplayer_minwidth=0.16 toplayer_maxwidth=0.16 toplayer_prefwidth=0.16 bottomlayer_minwidth=0.16 bottomlayer_maxwidth=0.16 bottomlayer_prefwidth=0.16 maxuncoupledlength=12.7
HoleSize [All] p1: absolutevalues=TRUE maxlimit=5 minlimit=0.15 maxpercent=80.000 minpercent=20.000
MinimumSolderMaskSliver [All] p1: minsoldermaskwidth=0.1
PlaneClearance [All] p1: clearance=0.508
PlaneConnect [All] p1: planeconnectstyle=Relief reliefexpansion=0.508 reliefentries=4 reliefconductorwidth=0.254 reliefairgap=0.254
PolygonConnect [All] p1: connectstyle=Relief reliefconductorwidth=0.35 reliefentries=4 polygonreliefangle="90 Angle" airgapwidth=0.35
RoomDefinition RoomDefinition_connector [False] p1: confinementstyle=ConfineIn formatcopy=TRUE lockcomponents=FALSE outline -0.051,4.013 0.025,4.089 69.621,4.089 69.621,0.051 69.596,0.025 69.571,0.051 -0.051,0.051 -0.051,4.293 0,4.343
RoutingVias [All] p1: holewidth=0.711 width=1.27 viastyle="Through Hole" minholewidth=0.711 minwidth=1.27 maxholewidth=0.711 maxwidth=1.27
SilkToSolderMaskClearance [IsPad] p1: minsilkscreentomaskgap=0.15 clearancetoexposedcopper=TRUE
SolderMaskExpansion [All] p1: expansion=0.076 istentingtop=FALSE
UnRoutedNet [All] p1: checkbadconnections=TRUE
Width Width_2 [All] p1: maxlimit=0.254 minlimit=0.254 preferedwidth=0.254
Width Width_1 [IsText And IsFree Or IsText And InAnyComponent] p2: maxlimit=0.254 minlimit=0.254 preferedwidth=0.254
Width [InNetClass('50_OHM_IMP')] p3: maxlimit=0.2 minlimit=0.09 preferedwidth=0.193 minimp=50.000000 maximp=50.000000 favimp=50.000000
23 further rules are at their usual default settings.

## Classes and differential pairs
differential pair class DIIF_100_OHM: DDR1_DQS0 DDR1_DQS1 DDR1_DQS2 DDR1_DQS3
net class 50_OHM_IMP: DDR1_D0 DDR1_D1 DDR1_D2 DDR1_D3 DDR1_D4 DDR1_D5 DDR1_D6 DDR1_D7 DDR1_D8 DDR1_D9 DDR1_D10 DDR1_D11 DDR1_D12 DDR1_D13 DDR1_D14 DDR1_D15 DDR1_D16 DDR1_D17 DDR1_D18 DDR1_D19 DDR1_D20 DDR1_D21 DDR1_D22 DDR1_D23 DDR1_D24 DDR1_D25 DDR1_D26 DDR1_D27 DDR1_D28 DDR1_D29 DDR1_D30 DDR1_D31 DDR1_DM0 DDR1_DM1 DDR1_DM2 DDR1_DM3
differential pair DDR1_DQS3: +DDR1_DQS3_P -DDR1_DQS3_N
differential pair DDR1_DQS2: +DDR1_DQS2_P -DDR1_DQS2_N
differential pair DDR1_DQS1: +DDR1_DQS1_P -DDR1_DQS1_N
differential pair DDR1_DQS0: +DDR1_DQS0_P -DDR1_DQS0_N

## Components (designator, comment, footprint, x,y, rotation, side; value= is the part's Value field where it differs from the comment)
B1 "SMD_IC_SY6280AAC" SOT95P285X140-5N 14.012,39.599 r270 bottom
C1 "22uF" CAP_0402 32.461,41.681 r270 top
C2 "10uF" CAP_0402 29.312,44.348 r270 top
C3 "1uF" CAP_0201 32.461,43.053 r270 top
C4 "22uF" CAP_0402 25.254,33.873 r90 top
C5 "100nF" CAP_0201 29.312,43.002 r270 top
C6 "100nF" CAP_0201 30.099,46.965 r90 top
C7 "100nF" CAP_0201 30.886,39.192 r90 top
C8 "100nF" CAP_0201 30.886,41.783 r270 top
C9 "100nF" CAP_0201 32.487,39.216 r90 top
C10 "100nF" CAP_0201 32.475,37.898 r90 top
C11 "10uF" CAP_0402 25.297,47.076 r270 top
C12 "1uF" CAP_0201 32.492,35.279 r90 top
C13 "100nF" CAP_0201 30.886,43.713 r90 top
C14 "100nF" CAP_0201 32.487,45.745 r270 top
C15 "100nF" CAP_0201 30.886,46.965 r270 top
C16 "100nF" CAP_0201 25.273,43.739 r90 top
C17 "100nF" CAP_0201 29.261,45.747 r270 top
C18 "100nF" CAP_0201 29.261,35.307 r90 top
C19 "22uF" CAP_0402 26.899,44.348 r270 top
C20 "10uF" CAP_0402 25.298,41.631 r270 top
C21 "1uF" CAP_0201 23.724,42.367 r90 top
C22 "100nF" CAP_0201 29.254,37.898 r90 top
C23 "100nF" CAP_0201 25.273,39.167 r90 top
C24 "100nF" CAP_0201 26.873,37.87 r90 top
C25 "100nF" CAP_0201 23.673,39.216 r90 top
C26 "100nF" CAP_0201 29.271,36.568 r90 top
C27 "100nF" CAP_0201 26.873,36.576 r90 top
C28 "22uF" CAP_0402 30.873,33.822 r90 top
C29 "10uF" CAP_0402 26.873,47.077 r270 top
C30 "1uF" CAP_0201 23.686,35.873 r270 top
C31 "100nF" CAP_0201 23.652,45.644 r270 top
C32 "100nF" CAP_0201 29.261,46.991 r270 top
C33 "100nF" CAP_0201 26.873,45.689 r270 top
C34 "100nF" CAP_0201 30.873,37.221 r270 top
C35 "100nF" CAP_0201 26.873,35.306 r90 top
C36 "100nF" CAP_0201 25.279,37.229 r270 top
C37 "22uF" CAP_0402 32.481,44.389 r270 top
C38 "10uF" CAP_0402 23.652,37.254 r270 top
C39 "1uF" CAP_0201 23.673,44.348 r270 top
C40 "100nF" CAP_0201 27.61,43.749 r270 top
C41 "100nF" CAP_0201 28.575,43.749 r270 top
C42 "100nF" CAP_0201 32.475,36.602 r90 top
C43 "100nF" CAP_0201 27.574,37.203 r90 top
C44 "100nF" CAP_0201 22.898,37.102 r270 top
C45 "100nF" CAP_0201 28.602,37.203 r90 top
C46 "22uF" CAP_0402 51.029,41.529 r270 top
C47 "10uF" CAP_0402 43.84,41.504 r270 top
C48 "1uF" CAP_0201 45.441,44.247 r270 top
C49 "100nF" CAP_0201 42.215,42.977 r270 top
C50 "100nF" CAP_0201 47.854,42.951 r270 top
C51 "100nF" CAP_0201 49.428,41.631 r270 top
C52 "100nF" CAP_0201 51.025,42.964 r270 top
C53 "100nF" CAP_0201 45.441,42.951 r270 top
C54 "100nF" CAP_0201 51.029,39.089 r90 top
C55 "22uF" CAP_0402 49.454,46.965 r270 top
C56 "10uF" CAP_0402 43.84,46.965 r270 top
C57 "1uF" CAP_0201 47.848,33.881 r90 top
C58 "100nF" CAP_0201 51.003,45.542 r270 top
C59 "100nF" CAP_0201 47.828,44.933 r90 top
C60 "100nF" CAP_0201 43.815,43.637 r90 top
C61 "100nF" CAP_0201 42.24,45.542 r270 top
C62 "100nF" CAP_0201 49.424,37.152 r270 top
C63 "100nF" CAP_0201 49.428,43.612 r90 top
C64 "22uF" CAP_0402 43.848,39.203 r90 top
C65 "10uF" CAP_0402 49.428,39.175 r90 top
C66 "1uF" CAP_0201 47.848,37.771 r90 top
C67 "100nF" CAP_0201 45.424,37.805 r90 top
C68 "100nF" CAP_0201 42.23,39.089 r90 top
C69 "100nF" CAP_0201 45.406,36.5 r90 top
C70 "100nF" CAP_0201 42.218,41.705 r270 top
C71 "100nF" CAP_0201 47.828,36.486 r90 top
C72 "100nF" CAP_0201 42.221,37.797 r90 top
C73 "22uF" CAP_0402 49.424,33.771 r90 top
C74 "10uF" CAP_0402 45.424,33.771 r90 top
C75 "1uF" CAP_0201 45.441,45.568 r270 top
C76 "100nF" CAP_0201 47.848,35.148 r90 top
C77 "100nF" CAP_0201 51.025,35.221 r90 top
C78 "100nF" CAP_0201 43.848,37.127 r270 top
C79 "100nF" CAP_0201 45.432,35.213 r90 top
C80 "100nF" CAP_0201 43.815,33.889 r90 top
C81 "100nF" CAP_0201 42.229,35.213 r90 top
C82 "22uF" CAP_0402 47.051,43.805 r270 top
C83 "10uF" CAP_0402 41.421,44.196 r270 top
C84 "1uF" CAP_0201 47.168,37.152 r90 top
C85 "100nF" CAP_0201 51.025,36.5 r90 top
C86 "100nF" CAP_0201 46.102,43.602 r270 top
C87 "100nF" CAP_0201 46.076,37.144 r90 top
C88 "100nF" CAP_0201 42.225,36.5 r90 top
C89 "100nF" CAP_0201 51,44.271 r270 top
C90 "100nF" CAP_0201 42.203,44.27 r270 top
C91 "10uF" CAP-T_1206 9.169,26.772 r90 bottom
C92 "4.7uF" CAP_0201 11.811,24.638 r90 bottom
C93 "4.7uF" CAP_0402 7.671,24.765 r270 bottom
C94 "100nF" CAP_0402 6.045,24.765 r270 bottom
C95 "10nF" CAP_0402 6.858,24.765 r270 bottom
C96 "10uF" CAP-T_1206 6.121,34.569 r90 bottom
C97 "1nF" CAP_0402 12.878,18.796 r270 bottom
C98 "10nF" CAP_0402 12.903,17.196 r90 bottom
C99 "100nF" CAP_0201 53.032,13.825 r0 top
C100 "10uF" CAP_0603 66.116,13.564 r90 top
C101 "100nF" CAP_0201 65.913,15.469 r270 top
C102 "100nF" CAP_0201 53.315,15.723 r90 top
C103 "22uF" CAP_0603 39.345,26.314 r225 bottom
C104 "10uF" CAP_0603 40.292,25.502 r225 bottom
C105 "10uF" CAP_0603 52.502,12.878 r0 top
C106 "100nF" CAP_0201 57.582,7.823 r90 top
C107 "100nF" CAP_0201 56.921,7.823 r90 top
C108 "1uF" CAP_0201 39.243,23.927 r225 bottom
C109 "1uF" CAP_0201 38.786,24.377 r225 bottom
C110 "100nF" CAP_0201 53.315,16.991 r90 top
C111 "1uF" CAP_0201 37.831,25.297 r45 bottom
C112 "1uF" CAP_0201 37.411,25.738 r45 bottom
C113 "100nF" CAP_0201 38.269,24.81 r225 bottom
C114 "1nF" CAP_0201 38.313,26.645 r225 bottom
C116 "10uF" CAP_0603 40.869,22.244 r315 bottom
C117 "1uF" CAP_0201 18.694,16.789 r90 bottom
C118 "1uF" CAP_0201 41.021,19.765 r315 bottom
C119 "1uF" CAP_0201 14.351,17.272 r90 bottom
C120 "100nF" CAP_0201 11.6,13.876 r135 bottom
C121 "100nF" CAP_0201 8.546,11.778 r315 bottom
C122 "1uF" CAP_0201 41.97,19.763 r135 bottom
C123 "1uF" CAP_0201 41.028,20.705 r135 bottom
C124 "1uF" CAP_0201 40.139,21.615 r315 bottom
C125 "100nF" CAP_0201 40.112,20.66 r315 bottom
C126 "1nF" CAP_0201 41.95,20.7 r315 bottom
C127 "22uF" CAP_0603 36.317,24.994 r315 bottom
C128 "22uF" CAP_0603 34.898,22.835 r45 bottom
C129 "22uF" CAP_0603 36.279,21.492 r45 bottom
C130 "1uF" CAP_0201 36,23.901 r135 bottom
C131 "1uF" CAP_0201 35.984,22.528 r45 bottom
C132 "1uF" CAP_0201 37.82,21.615 r225 bottom
C133 "1uF" CAP_0201 37.376,23.448 r135 bottom
C134 "1uF" CAP_0201 34.041,23.353 r45 bottom
C135 "100nF" CAP_0201 36.909,20.704 r45 bottom
C136 "1nF" CAP_0201 36.933,23 r135 bottom
C137 "1nF" CAP_0201 37.807,23.898 r135 bottom
C138 "22uF" CAP_0603 38.557,19.123 r45 bottom
C139 "10uF" CAP_0603 38.087,20.53 r45 bottom
C140 "1uF" CAP_0201 40.131,19.332 r225 bottom
C141 "1uF" CAP_0201 39.219,21.594 r135 bottom
C142 "1uF" CAP_0201 40.589,18.873 r225 bottom
C143 "1uF" CAP_0201 40.587,23.885 r315 bottom
C144 "100nF" CAP_0201 39.635,20.195 r315 bottom
C145 "1nF" CAP_0201 41.053,24.359 r315 bottom
C146 "22uF" CAP_0603 42.087,23.6 r225 bottom
C154 "100nF" CAP_0201 43.787,21.133 r45 bottom
C155 "1nF" CAP_0201 42.381,22.504 r225 bottom
C156 "1nF" CAP_0201 42.418,21.158 r315 bottom
C157 "1nF" CAP_0201 42.901,21.617 r135 bottom
C158 "1nF" CAP_0201 43.358,22.074 r135 bottom
C159 "1nF" CAP_0201 43.813,22.53 r135 bottom
C160 "22uF" CAP_0402 34.979,24.342 r45 bottom
C161 "10uF" CAP_0402 34.328,25.316 r315 bottom
C162 "1uF" CAP_0402 33.76,24.731 r315 bottom
C163 "100nF" CAP_0402 34.619,26.152 r315 bottom
C164 "100nF" CAP_0402 36.533,26.205 r135 bottom
C165 "100nF" CAP_0402 37.533,26.838 r225 bottom
C166 "100nF" CAP_0402 36.61,27.533 r315 bottom
C167 "100nF" CAP_0402 39.319,28.27 r315 bottom
C168 "100nF" CAP_0402 38.729,27.644 r315 bottom
C169 "22uF" CAP_0402 38.195,29.337 r315 bottom
C170 "10uF" CAP_0402 37.617,28.771 r315 bottom
C171 "1uF" CAP_0402 35.585,27.419 r315 bottom
C172 "100nF" CAP_0402 41.25,27.355 r225 bottom
C173 "100nF" CAP_0402 41.873,26.822 r225 bottom
C174 "100nF" CAP_0402 41.628,25.381 r45 bottom
C175 "100nF" CAP_0402 42.746,26.517 r225 bottom
C176 "100nF" CAP_0402 42.771,25.39 r225 bottom
C177 "100nF" CAP_0402 43.534,25.019 r225 bottom
C178 "100nF" CAP_0201 44.729,16.078 r315 bottom
C179 "12pF" CAP_0201 43.485,10.947 r135 top
C180 "12pF" CAP_0201 48.155,13.205 r315 top
C181 "100nF" CAP_0201 42.443,18.44 r135 bottom
C182 "100nF" CAP_0201 42.875,18.872 r135 bottom
C183 "100nF" CAP_0201 39.243,22.428 r315 bottom
C184 "100nF" CAP_0201 36.043,19.304 r315 bottom
C185 "1uF" CAP_0201 21.717,16.942 r90 top
C186 "1uF" CAP_0201 21.692,21.666 r270 top
C187 "100nF" CAP_0201 44.247,20.676 r45 bottom
C188 "100nF" CAP_0201 45.161,21.184 r135 bottom
C189 "100nF" CAP_0201 42.901,17.374 r225 bottom
C190 "100nF" CAP_0201 41.478,18.923 r45 bottom
C191 "1nF" CAP_0201 37.389,11.938 r45 bottom
C192 "1uF" CAP_0201 44.704,20.218 r45 bottom
C193 "1uF" CAP_0201 44.704,22.047 r225 bottom
C194 "100nF" CAP_0201 39.243,15.189 r135 bottom
C195 "100nF" CAP_0201 50.673,22.504 r225 bottom
C196 "100nF" CAP_0201 51.587,23.393 r45 bottom
C197 "100nF" CAP_0201 51.638,22.073 r315 bottom
C198 "100nF" CAP_0201 52.121,22.555 r315 bottom
C199 "100nF" CAP_0201 51.156,21.59 r315 bottom
C200 "100nF" CAP_0201 52.045,20.701 r315 bottom
C201 "100nF" CAP_0201 50.19,21.59 r135 bottom
C202 "100nF" CAP_0201 51.156,20.701 r315 bottom
C203 "100nF" CAP_0201 34.62,20.692 r315 bottom
C204 "100nF" CAP_0201 43.332,23.444 r45 bottom
C205 "1uF" CAP_0201 44.298,23.012 r315 bottom
C206 "100nF" CAP_0201 39.192,18.364 r225 bottom
C207 "1uF" CAP_0201 39.649,17.907 r225 bottom
C208 "100nF" CAP_0201 32.269,22.998 r135 bottom
C209 "100nF" CAP_0201 44.679,23.495 r135 bottom
C210 "100nF" CAP_0201 41.066,17.901 r315 bottom
C211 "100nF" CAP_0201 35.077,18.39 r135 bottom
C212 "100nF" CAP_0201 37.783,16.99 r45 bottom
C213 "100nF" CAP_0201 40.607,17.457 r315 bottom
C214 "100nF" CAP_0201 33.718,21.612 r315 bottom
C215 "100nF" CAP_0201 40.624,16.065 r45 bottom
C216 "100nF" CAP_0201 45.683,23.852 r225 bottom
C217 "100nF" CAP_0201 32.766,22.077 r225 bottom
C218 "100nF" CAP_0201 36.958,18.391 r135 bottom
C219 "100nF" CAP_0201 45.618,22.047 r225 bottom
C220 "100nF" CAP_0201 38.71,17.45 r135 bottom
C221 "100nF" CAP_0201 34.604,17.925 r135 bottom
C222 "100nF" CAP_0201 56.236,7.823 r90 top
C223 "100nF" CAP_0201 31.344,22.987 r315 bottom
C224 "100nF" CAP_0201 31.849,22.04 r45 bottom
C225 "100nF" CAP_0201 31.369,23.901 r315 bottom
C226 "100nF" CAP_0201 36.5,17.932 r135 bottom
C227 "100nF" CAP_0201 50.662,20.224 r315 bottom
C228 "100nF" CAP_0201 32.741,23.47 r135 bottom
C229 "100nF" CAP_0201 42.89,19.751 r135 bottom
C230 "100nF" CAP_0201 43.358,20.218 r135 bottom
C231 "100nF" CAP_0402 12.818,40.132 r90 top
C232 "1uF" CAP_0402 13.141,45.836 r315 bottom
C233 "1uF" CAP_0402 16.71,45.166 r315 bottom
C234 "1uF" CAP_0402 12.613,47.849 r45 bottom
C235 "220pF" CAP_0402 17.297,45.771 r135 bottom
C236 "220pF" CAP_0402 16.123,44.587 r135 bottom
C237 "100nF" CAP_0201 16.3,40.294 r90 top
C238 "100nF" CAP_0201 17.018,40.294 r90 top
C239 "100nF" CAP_0201 12.993,44.138 r270 bottom
C240 "100nF" CAP_0201 12.319,44.145 r270 bottom
C241 "10nF" CAP_0402 14.961,42.367 r270 bottom
C242 "100nF" CAP_0201 13.506,40.294 r90 top
C243 "10uF" CAP_0402 13.081,36.627 r90 bottom
C244 "100nF" CAP_0201 15.906,42.559 r90 bottom
C245 "1uF" CAP_0201 58.623,4.369 r90 bottom
C246 "100nF" CAP_0201 55.651,4.369 r90 bottom
C247 "100nF" CAP_0201 51.968,7.493 r0 bottom
C248 "100nF" CAP_0201 55.22,14.224 r270 bottom
C249 "100nF" CAP_0201 59.614,14.224 r270 bottom
C250 "100nF" CAP_0201 61.747,11.379 r180 bottom
C251 "100nF" CAP_0201 61.747,9.906 r180 bottom
C252 "1uF" CAP_0402 56.566,14.376 r270 bottom
C253 "1uF" CAP_0402 57.379,14.376 r270 bottom
C254 "100nF" CAP_0201 58.801,15.545 r270 bottom
C255 "4.7nF" CAP_0201 55.88,14.224 r270 bottom
C256 "1uF" CAP_0201 51.968,10.516 r0 bottom
C257 "100nF" CAP_0201 61.787,10.529 r180 bottom
C258 "100nF" CAP_0201 61.747,11.989 r180 bottom
C259 "100nF" CAP_0201 61.747,8.564 r180 bottom
C260 "100nF" CAP_0201 61.747,7.874 r180 bottom
C261 "10uF" CAP_0402 61.062,14.376 r270 bottom
C262 "100nF" CAP_0201 60.3,14.224 r270 bottom
C263 "12pF" CAP_0402 68.288,11.938 r315 bottom
C264 "12pF" CAP_0402 63.568,9.373 r135 bottom
C265 "10uF" CAP_0402 9.779,31.826 r270 top
C266 "100nF" CAP_0402 8.966,31.826 r270 top
C267 "10uF" CAP_0402 14.783,27.534 r90 top
C268 "10uF" CAP_0402 15.596,27.534 r90 top
C269 "220nF" CAP_0402 5.842,35.611 r225 top
C270 "22uF" CAP_0402 8.128,41.961 r135 top
C271 "22uF" CAP_0402 7.544,41.377 r135 top
C272 "100nF" CAP_0402 6.96,40.792 r135 top
C273 "100nF" CAP_0402 11.024,38.024 r135 top
C274 "10uF" CAP_0402 10.465,39.675 r315 top
C275 "10uF" CAP_0402 11.582,38.608 r135 top
C276 "4.7uF" CAP_0402 17.348,35.789 r90 top
C277 "22uF" CAP_0402 54,41.732 r90 top
C278 "22uF" CAP_0402 54.813,41.732 r90 top
C279 "100nF" CAP_0201 55.575,41.894 r90 top
C280 "1uF" CAP_0402 7.518,33.934 r45 top
C281 "1uF" CAP_0402 37.567,45.415 r270 top
C282 "100nF" CAP_0402 36.754,45.415 r270 top
C283 "100nF" CAP_0402 36.119,43.409 r90 top
C284 "1uF" CAP_0402 37.922,40.843 r0 top
C285 "22uF" CAP_0402 29.669,7.375 r135 top
C286 "100nF" CAP_0402 29.077,6.782 r135 top
C287 "100nF" CAP_0402 27.478,6.836 r135 top
C288 "22uF" CAP_0402 27.503,15.511 r135 top
C289 "100nF" CAP_0402 24.935,15.493 r315 top
C290 "100nF" CAP_0402 25.509,16.068 r315 top
C291 "100nF" CAP_0402 28.257,11.488 r45 top
C292 "22uF" CAP_0402 33.567,8.937 r135 top
C293 "22uF" CAP_0402 32.974,8.345 r135 top
C294 "22uF" CAP_0402 34.16,9.53 r135 top
C295 "22uF" CAP_0402 26.65,11.173 r135 top
C296 "22uF" CAP_0402 26.066,10.59 r135 top
C297 "22uF" CAP_0402 25.482,10.006 r135 top
C298 "22uF" CAP_0402 24.899,9.422 r135 top
C299 "100nF" CAP_0402 27.485,12.26 r45 top
C300 "10uF" CAP_0402 22.652,28.212 r135 top
C301 "100nF" CAP_0402 22.077,27.637 r135 top
C302 "10uF" CAP_0402 26.814,26.419 r225 top
C303 "100nF" CAP_0402 22.167,26.326 r315 top
C304 "22uF" CAP_0402 18.862,29.703 r315 top
C305 "10uF" CAP_0402 28.969,31.879 r135 top
C306 "22nF" CAP_0402 18.395,24.494 r135 top
C307 "100nF" CAP_0402 58.877,37.109 r270 top
C308 "100nF" CAP_0402 59.69,37.109 r270 top
C309 "22uF" CAP_0603 64.364,29.185 r180 top
C310 "22uF" CAP_0603 64.364,33.401 r180 top
C311 "22uF" CAP_0603 53.848,28.372 r0 top
C312 "22uF" CAP_0603 59.106,26.949 r90 top
C313 "2.2uF" CAP_0402 60.858,27.356 r90 top
C314 "2.2uF" CAP_0402 61.671,27.356 r90 top
C315 "2.2uF" CAP_0402 54.237,35.55 r0 bottom
C316 "2.2uF" CAP_0402 54.237,34.737 r0 bottom
C317 "22uF" CAP_0603 48.311,31.953 r90 top
C318 "22uF" CAP_0603 55.575,37.719 r270 bottom
C319 "22uF" CAP_0603 60.554,34.112 r0 bottom
C320 "22uF" CAP_0603 60.63,29.083 r0 bottom
C321 "47pF" CAP_0402 60.325,37.084 r90 bottom
C322 "22uF" CAP_0603 63.246,26.772 r90 bottom
C323 "22uF" CAP_0603 62.027,26.772 r90 bottom
C324 "2.2uF" CAP_0402 54.237,30.673 r0 bottom
C325 "2.2uF" CAP_0402 54.237,29.047 r0 bottom
C326 "2.2uF" CAP_0402 54.237,36.362 r0 bottom
C327 "2.2uF" CAP_0402 54.237,28.234 r0 bottom
C328 "100nF" CAP_0402 63.983,31.039 r0 top
C329 "1uF" CAP_0402 55.677,37.084 r270 top
C330 "1uF" CAP_0402 54.237,33.111 r0 bottom
C331 "1uF" CAP_0402 54.237,32.298 r0 bottom
C332 "1uF" CAP_0402 54.237,29.86 r0 bottom
C333 "1uF" CAP_0402 54.229,30.201 r0 top
C334 "1uF" CAP_0402 54.229,29.388 r0 top
C335 "1uF" CAP_0402 58.09,27.356 r90 top
C336 "1uF" CAP_0402 63.983,30.201 r180 top
C337 "2.2uF" CAP_0402 54.237,33.924 r0 bottom
C338 "2.2uF" CAP_0402 54.237,31.486 r0 bottom
C339 "1uF" CAP_0402 63.983,32.385 r180 top
C340 "1uF" CAP_0402 54.229,32.233 r0 top
C341 "22pF" CAP_0402 60.274,38.837 r270 top
C342 "100nF" CAP_0402 63.957,37.338 r270 top
C343 "22pF" CAP_0402 54.813,38.887 r270 top
C344 "100nF" CAP_0402 63.957,34.442 r180 top
C345 "100nF" CAP_0402 63.957,35.255 r180 top
C346 "100nF" CAP_0402 54.229,33.299 r0 top
C347 "10uF" CAP_0402 61.417,40.767 r90 bottom
D1 "BZT52C3V3T-7" DIO_SOD523 29.337,15.422 r135 top
D2 "BZT52C3V3T-7" DIO_SOD523 38.689,6.412 r225 top
D3 "BZT52C3V3T-7" DIO_SOD523 41.213,8.946 r45 top
D4 "BZT52C3V3T-7" DIO_SOD523 14.58,38.837 r180 top
D5 "BAT54CWT1G" DIO_SOT-323-3 62.306,37.948 r90 top
D6 "1N4148WT" DIO_SOD523 65.837,37.821 r90 top
D7 "AVRL101A1R1NTB" DIO_0402_SMD 66.954,38.659 r90 top
DS1 "RED LED" LED_0805 6.985,29.032 r270 top
FB1 "BLM15PD121SN1D" RES_0402 33.325,43.332 r90 top
FB2 "BLM15PD121SN1D" RES_0402 41.427,42.57 r90 top
FB3 "BLM15PD121SN1D" RES_0402 35.139,26.746 r135 bottom
FB4 "BLM15PD121SN1D" RES_0402 37.157,28.115 r315 bottom
FB5 "BLM15PD121SN1D" RES_0402 44.284,24.508 r225 bottom
FB6 "BLM15PD121SN1D" RES_0402 40.53,27.832 r225 bottom
FB7 "BLM15PD121SN1D" RES_0402 41.961,17.983 r135 bottom
FB8 "BLM15PD121SN1D" RES_0402 39.7,23.343 r225 bottom
FB9 "BLM15PD121SN1D" RES_0402 36.906,19.456 r135 bottom
FB10 "BLM15PD121SN1D" RES_0402 39.878,16.307 r225 bottom
J1 "ECT818000071" CON3_UFL_116_SMD_ST 2.421,14.897 r90 top
J2 "ECT818000071" CON3_UFL_116_SMD_ST 2.421,10.203 r90 top
J3 "U262-241N-4BV64" CON24_19.64_U262-241N-4BV64_TH_RA 14.575,44.225 r180 top
J4 "UJC-HP-3-SMT-TR" CON6_48.4_UJC-HP-3-SMT-TR 57.15,45.25 r180 top
J5 "DIMM 260" DIMM260_DDR4 34.79,1.397 r0 top
L1 "WPN201610H4R7MT" IND_62.9_110X86.6_SMD 62.916,13.741 r180 bottom
L2 "DFE252010P-1R0M=P2" IND_1008 12.294,27.94 r0 top
L3 "WPN4020H1R5MT" IND_1616 4.445,38.913 r45 top
L4 "DFE252010P-1R0M=P2" IND_1008 31.304,10.051 r45 top
L5 "DFE252010P-R47M=P2" IND_1008 23.588,12.134 r315 top
L6 "DFE252010P-1R0M=P2" IND_1008 20.748,30.367 r135 top
L7 "CB2012T1R0M" IND_0805 28.304,30.567 r135 top
L8 "DFE252010P-1R0M=P2" IND_1008 58.09,37.77 r180 bottom
L9 "DFE252010P-1R0M=P2" IND_1008 60.579,31.598 r90 bottom
L10 "DFE252010P-1R0M=P2" IND_1008 63.348,37.694 r180 bottom
L11 "DFE252010P-1R0M=P2" IND_1008 59.487,26.772 r180 bottom
Q1 "WNM2021-3/TR" SOT-323-3 4.928,28.974 r90 top
Q2 "SI7615CDN-T1-GE3" PowerPAK_1212-8_SMD 15.243,35.591 r180 top
Q3 "BSS84W-7-F" SOT-323-3 66.091,23.825 r0 bottom
Q4 "MMBT3904WT1G" SOT-323-3 61.824,23.952 r0 bottom
Q5 "WNM2016-3/TR" "SOT 23-3" 63.856,40.767 r180 bottom
Q6 "WNM2021-3/TR" SOT-323-3 64.16,34.468 r270 bottom
R1 "10K" RES_0201 24.486,37.211 r270 top
R2 "10K" RES_0201 24.105,43.383 r0 top
R3 "240" RES_0201 26.873,33.985 r90 top
R4 "240" RES_0201 29.261,33.985 r90 top
R5 "10k" RES_0201 50.216,43.612 r90 top
R6 "10k" RES_0201 50.597,37.465 r180 top
R7 "240" RES_0201 47.854,46.888 r90 top
R8 "240" RES_0201 45.441,46.888 r90 top
R9 "10K" RES_0201 58.308,7.787 r90 top
R10 "10K" RES_0201 10.643,24.663 r270 bottom
R11 "40.2K" RES_0201 6.883,30.81 r270 bottom
R12 "10K" RES_0201 6.121,30.81 r90 bottom
R13 "1K" RES_0402 5.385,30.861 r90 bottom
R14 "1K" RES_0201 12.065,18.745 r270 bottom
R15 "10K" RES_0201 9.387,10.856 r315 bottom
R16 "47K" RES_0402 19.431,16.942 r90 bottom
R17 "120K" RES_0402 16.916,15.24 r0 bottom
R18 "10K" RES_0201 42.795,15.64 r225 bottom
R19 "240R" RES_0201 34.072,27.758 r315 bottom
R20 "240R" RES_0201 42.899,27.698 r225 bottom
R21 "1M" RES_0201 43.967,11.43 r135 top
R22 "33R" RES_0201 45.644,15.164 r135 bottom
R23 "1K" RES_0201 48.641,13.691 r135 top
R24 "33R" RES_0201 43.307,15.138 r225 bottom
R25 "22R" RES_0201 46.507,19.304 r45 bottom
R26 "10K" RES_0201 47.015,18.796 r225 bottom
R27 "100R" RES_0201 36.906,12.446 r225 bottom
R28 "1.62K" RES_0201 33.731,17.932 r315 bottom
R29 "6.04K" RES_0201 45.212,24.308 r45 bottom
R30 "10K" RES_0201 33.691,18.914 r315 bottom
R31 "4.02K" RES_0201 32.314,19.767 r45 bottom
R32 "499R" RES_0201 34.595,16.535 r45 bottom
R33 "499R" RES_0201 36.881,16.078 r45 bottom
R34 "499R" RES_0201 35.966,14.707 r315 bottom
R35 "499R" RES_0201 35.509,15.672 r45 bottom
R36 "1K" RES_0201 38.338,9.211 r225 bottom
R37 "133R" RES_0201 42.373,12.009 r315 bottom
R38 "1K" RES_0201 41.405,7.847 r45 top
R39 "133R" RES_0201 41.484,12.898 r135 bottom
R40 "4.02K" RES_0201 32.791,18.821 r135 bottom
R41 "4.02K" RES_0201 31.775,20.295 r45 bottom
R42 "2.2K" RES_0201 49.759,19.329 r315 bottom
R43 "2.2K" RES_0201 46.482,21.59 r315 bottom
R44 "2.2K" RES_0201 48.819,20.269 r135 bottom
R45 "2.2K" RES_0201 47.93,20.752 r45 bottom
R46 "22R" RES_0201 46.991,23.413 r45 bottom
R47 "1K" RES_0201 30.048,22.53 r315 bottom
R48 "1K" RES_0201 26.365,21.615 r135 bottom
R49 "22R" RES_0201 45.644,22.962 r225 bottom
R50 "22R" RES_0201 48.445,23.441 r135 bottom
R51 "22R" RES_0201 46.527,23.87 r225 bottom
R52 "1K" RES_0402 29.54,22.022 r135 bottom
R53 "1K" RES_0402 27.381,21.615 r135 bottom
R54 "22R" RES_0201 46.553,22.459 r315 bottom
R55 "22R" RES_0201 46.504,24.819 r225 bottom
R56 "22R" RES_0201 48.884,22.032 r135 bottom
R57 "2.2K" RES_0201 46.152,17.501 r135 bottom
R58 "2.2K" RES_0201 44.704,19.329 r225 bottom
R59 "2.2K" RES_0201 45.618,16.967 r135 bottom
R60 "2.2K" RES_0201 46.533,16.053 r315 bottom
R61 "2.2K" RES_0201 26.34,24.333 r135 bottom
R62 "2.2K" RES_0201 32.309,25.273 r45 bottom
R63 "1K" RES_0402 15.638,40.132 r90 top
R64 "3.4K" RES_0402 13.056,42.367 r90 bottom
R65 "2M" RES_0201 14.203,40.259 r90 top
R66 "2M" RES_0201 17.323,42.524 r90 bottom
R67 "100K" RES_0201 16.586,42.524 r90 bottom
R68 "100K" RES_0201 14.92,40.259 r90 top
R69 "0R" RES_0201 58.095,14.239 r90 bottom
R70 "0R" RES_0201 58.115,15.519 r90 bottom
R71 "4.7K" RES_0201 56.591,15.824 r90 bottom
R72 "4.7K" RES_0201 50.597,10.008 r180 bottom
R73 "4.7K" RES_0201 55.804,15.519 r90 bottom
R74 "33R" RES_0201 62.84,8.636 r270 bottom
R75 "2.49K" RES_0201 63.094,11.557 r180 bottom
R76 "33R" RES_0201 51.918,9.5 r0 bottom
R77 "0R" RES_0201 54.508,14.249 r270 bottom
R78 "0R" RES_0201 53.746,14.224 r270 bottom
R79 "33R" RES_0201 51.943,11.252 r0 bottom
R80 "4.7K" RES_0201 59.542,15.59 r90 bottom
R81 "4.7K" RES_0201 51.918,8.23 r0 bottom
R82 "4.7K" RES_0201 51.918,8.839 r180 bottom
R83 "4.7K" RES_0201 60.325,15.596 r270 bottom
R84 "4.7K" RES_0201 58.801,14.249 r90 bottom
R85 "4.7K" RES_0201 57.404,15.824 r270 bottom
R86 "4.7K" RES_0201 50.851,8.534 r90 bottom
R87 "4.7K" RES_0201 51.943,6.502 r0 bottom
R88 "4.7K" RES_0201 50.063,8.534 r90 bottom
R89 "4.7K" RES_0201 49.276,8.534 r90 bottom
R90 "1.1K" RES_0201 61.765,9.234 r180 bottom
R91 "4.7K" RES_0201 48.489,8.534 r90 bottom
R92 "4.7K" RES_0201 8.306,28.423 r90 top
R93 "1K" RES_0201 3.506,27.745 r90 top
R94 "30K" RES_0402 14.732,30.683 r270 top
R95 "6.8K" RES_0402 15.57,30.683 r90 top
R96 "3.3R" RES_0402 6.401,35.052 r225 top
R97 "100K" RES_0402 18.136,35.789 r90 top
R98 "100K" RES_0402 9.906,39.116 r315 top
R99 "200K" RES_0402 18.923,35.789 r90 top
R100 "10K" RES_0402 10.643,34.874 r135 top
R101 "5.6K" RES_0201 57.455,41.935 r90 top
R102 "5.6K" RES_0201 56.464,41.935 r90 top
R103 "10K" RES_0402 10.084,34.315 r135 top
R104 "100K" RES_0402 6.96,34.519 r225 top
R105 "10K" RES_0402 29.407,12.637 r45 top
R106 "10K" RES_0402 28.635,13.409 r45 top
R107 "100R" RES_0402 30.442,11.919 r45 top
R108 "100R" RES_0402 25.725,12.619 r135 top
R109 "10K" RES_0402 21.61,25.769 r315 top
R110 "100K" RES_0402 18.395,26.685 r315 top
R111 "100K" RES_0402 63.957,23.825 r270 bottom
R112 "100K" RES_0402 25.485,29.759 r45 top
R113 "10K" RES_0402 58.861,23.982 r270 bottom
R114 "200K" RES_0402 17.318,25.582 r135 top
R115 "47K" RES_0402 59.686,23.991 r270 bottom
R116 "200K" RES_0402 27.281,29.58 r135 top
R117 "39K" RES_0402 19.516,25.59 r135 top
R118 "118K" RES_0402 17.857,26.146 r135 top
R119 "5.6K" RES_0402 20.066,24.512 r45 top
R120 "12K" RES_0402 18.952,25.051 r135 top
R121 "200K" RES_0402 60.325,38.633 r270 bottom
R122 "51K" RES_0402 61.112,37.821 r270 bottom
R123 "0.1R" RES_0402 56.998,37.084 r90 top
R124 "10K" RES_0402 56.998,27.356 r270 top
R125 "10K" RES_0402 64.745,37.338 r270 top
R126 "10K" RES_0402 58.064,37.109 r270 top
R127 "100R" RES_0402 62.459,27.356 r270 top
R128 "100R" RES_0402 66.904,36.551 r90 top
R129 "300K" RES_0402 63.984,27.356 r270 top
R130 "100K" RES_0402 65.811,33.122 r90 bottom
R131 "300K" RES_0402 63.221,27.356 r90 top
SW1 "4982" SW_177_39.3X77.7_SMD 67.453,26.118 r270 top
SW2 "4982" SW_177_39.3X77.7_SMD 12.36,6.486 r180 top
SW3 "4982" SW_177_39.3X77.7_SMD 67.548,32.513 r90 top
U1 "RS512M32LZ4D2ANP-75BT" FBGA200_SMD 28.075,40.475 r0 bottom
U2 "RS512M32LZ4D2ANP-75BT" FBGA200_SMD 46.625,40.375 r180 bottom
U3 "KLMAG2WEMB-B031" BGA153C50P14X14_1150X1300X70 59.531,15.052 r0 top
U4 "LD39050PUR" DFN-6_37.4_165_33X15_SMD 9.373,31.471 r180 bottom
U5 "WF60" MOD_WF60 12.559,15.98 r90 top locked
U6 "TXB0108NMER" NFBGA_31.4_125.9X102.36 10.064,12.807 r135 bottom
U7 "RT9193-18GU5" SC70-5 16.408,16.916 r180 bottom
U8 "RK3399" FBGA828_23_826X826 38.52,22.296 r315 top
U9 "RT9193-18GU5" SC70-5 22.352,19.279 r90 top
U10 "FUSB302MPX" MLP-14_98.4X98.4_SMD 14.969,47.102 r45 bottom
U11 "RTL8211E-VB-CG" QFN48_19.6_324X324_SMD 56.866,9.26 r90 bottom
U12 "MP2143DJ-LF-Z" SOT23-8 12.268,31.064 r0 top
U13 "NB680GD-Z" QFN-12_19_118X118_SMD 8.614,36.912 r225 top
U14 "RT9193-33PU5" SC70-5 37.944,42.926 r90 top
U15 "SYR838PKC" CSP20_15.7_100x84_SMD 27.945,8.776 r45 top
U16 "SYR838PKC" CSP20_15.7_100x84_SMD 26.605,14.074 r225 top
U17 "RT8010GQW" WDFN-6_26_133X100_SMD 19.94,27.44 r135 top
U18 "RT8010GQW" WDFN-6_26_133X100_SMD 26.059,27.999 r45 top
U19 "RK808-D" QFN68_13.7_220.4X220.4_SMD 59.102,32.224 r0 top
Y1 "ECS-327MVATX-3-CN-TR" XTAL_57_35X31_SMD 10.668,19.05 r270 bottom
Y2 "24Mhz" XTAL_ABM8AIG-24.000MHZ-12-2Z-T3 46.114,12.392 r315 top
Y3 "24Mhz" XTAL_ABM8AIG-24.000MHZ-12-2Z-T3 65.785,10.758 r225 bottom
Y4 "ECS-.327-6-34RR-TR" XTAL_ECS-.327-6-34RR-TR 57.531,38.862 r0 top

## Footprints (in the part's own frame and the unit in brackets; to place one, negate y for a bottom-side part, rotate by r counter-clockwise, add the part's x,y. Pads: shape width x height; smd on the part's side, far side on the other; paste and mask are expansions set on the pad)
BGA153C50P14X14_1150X1300X70 [mm] "BGA, 153-Leads, Body 11.50x13.00mmx0.70mm, Pitch 0.50mm"
  round 0.28 smd: A1(-3.25,3.25) A2(-2.75,3.25) A3(-2.25,3.25) A4(-1.75,3.25) A5(-1.25,3.25) A6(-0.75,3.25) A7(-0.25,3.25) A8(0.25,3.25) A9(0.75,3.25) A10(1.25,3.25) A11(1.75,3.25) A12(2.25,3.25) A13(2.75,3.25) A14(3.25,3.25) B1(-3.25,2.75) B2(-2.75,2.75) B3(-2.25,2.75) B4(-1.75,2.75) B5(-1.25,2.75) B6(-0.75,2.75) B7(-0.25,2.75) B8(0.25,2.75) B9(0.75,2.75) B10(1.25,2.75) B11(1.75,2.75) B12(2.25,2.75) B13(2.75,2.75) B14(3.25,2.75) C1(-3.25,2.25) C2(-2.75,2.25) C3(-2.25,2.25) C4(-1.75,2.25) C5(-1.25,2.25) C6(-0.75,2.25) C7(-0.25,2.25) C8(0.25,2.25) C9(0.75,2.25) C10(1.25,2.25) C11(1.75,2.25) C12(2.25,2.25) C13(2.75,2.25) C14(3.25,2.25) D1(-3.25,1.75) D2(-2.75,1.75) D3(-2.25,1.75) D4(-1.75,1.75) D12(2.25,1.75) D13(2.75,1.75) D14(3.25,1.75) E1(-3.25,1.25) E2(-2.75,1.25) E3(-2.25,1.25) E5(-1.25,1.25) E6(-0.75,1.25) E7(-0.25,1.25) E8(0.25,1.25) E9(0.75,1.25) E10(1.25,1.25) E12(2.25,1.25) E13(2.75,1.25) E14(3.25,1.25) F1(-3.25,0.75) F2(-2.75,0.75) F3(-2.25,0.75) F5(-1.25,0.75) F10(1.25,0.75) F12(2.25,0.75) F13(2.75,0.75) F14(3.25,0.75) G1(-3.25,0.25) G2(-2.75,0.25) G3(-2.25,0.25) G5(-1.25,0.25) G10(1.25,0.25) G12(2.25,0.25) G13(2.75,0.25) G14(3.25,0.25) H1(-3.25,-0.25) H2(-2.75,-0.25) H3(-2.25,-0.25) H5(-1.25,-0.25) H10(1.25,-0.25) H12(2.25,-0.25) H13(2.75,-0.25) H14(3.25,-0.25) J1(-3.25,-0.75) J2(-2.75,-0.75) J3(-2.25,-0.75) J5(-1.25,-0.75) J10(1.25,-0.75) J12(2.25,-0.75) J13(2.75,-0.75) J14(3.25,-0.75) K1(-3.25,-1.25) K2(-2.75,-1.25) K3(-2.25,-1.25) K5(-1.25,-1.25) K6(-0.75,-1.25) K7(-0.25,-1.25) K8(0.25,-1.25) K9(0.75,-1.25) K10(1.25,-1.25) K12(2.25,-1.25) K13(2.75,-1.25) K14(3.25,-1.25) L1(-3.25,-1.75) L2(-2.75,-1.75) L3(-2.25,-1.75) L12(2.25,-1.75) L13(2.75,-1.75) L14(3.25,-1.75) M1(-3.25,-2.25) M2(-2.75,-2.25) M3(-2.25,-2.25) M4(-1.75,-2.25) M5(-1.25,-2.25) M6(-0.75,-2.25) M7(-0.25,-2.25) M8(0.25,-2.25) M9(0.75,-2.25) M10(1.25,-2.25) M11(1.75,-2.25) M12(2.25,-2.25) M13(2.75,-2.25) M14(3.25,-2.25) N1(-3.25,-2.75) N2(-2.75,-2.75) N3(-2.25,-2.75) N4(-1.75,-2.75) N5(-1.25,-2.75) N6(-0.75,-2.75) N7(-0.25,-2.75) N8(0.25,-2.75) N9(0.75,-2.75) N10(1.25,-2.75) N11(1.75,-2.75) N12(2.25,-2.75) N13(2.75,-2.75) N14(3.25,-2.75) P1(-3.25,-3.25) P2(-2.75,-3.25) P3(-2.25,-3.25) P4(-1.75,-3.25) P5(-1.25,-3.25) P6(-0.75,-3.25) P7(-0.25,-3.25) P8(0.25,-3.25) P9(0.75,-3.25) P10(1.25,-3.25) P11(1.75,-3.25) P12(2.25,-3.25) P13(2.75,-3.25) P14(3.25,-3.25)
  silkscreen extent -5.75,-6.5 5.75,6.5, body extent -5.75,-6.5 5.75,6.5, height 0.7
CAP-T_1206 [mil] "Tantalum Capacitor"
  rect 60x60 smd: 1(-67.49,-0.2) 2(67.51,-0.2)
  silkscreen extent -107,-40 108,40, body extent -63,-31 63,32, height 39
CAP_0201 [mm]
  rect 0.3x0.3 smd: 1(-0.3,0) 2(0.3,0)
  silkscreen extent -0.6,-0.3 0.6,0.3, body extent -0.44,-0.15 0.44,0.15, height 0.31
CAP_0402 [mm] "Capacitor"
  rect 0.5x0.5 smd mask+0.051: 1(-0.406,0) 2(0.406,0)
  silkscreen extent -0.76,-0.36 0.76,0.36, body extent -0.53,-0.28 0.52,0.27, height 0.55
CAP_0603 [mm] "Capacitor"
  rect 0.6x0.9 smd mask+0.051: 1(-0.711,0) 2(0.711,0)
  silkscreen extent -1.14,-0.56 1.14,0.56, body extent -0.88,-0.48 0.87,0.47, height 0.87
CON3_UFL_116_SMD_ST [mm] "UFL Connector"
  rect 1.05x2.2 smd: 1(-1.475,0.763) 3(1.475,0.763)
  rect 1x1.05 smd: 2(0,-0.763)
  silkscreen extent -2.25,-1.54 2.25,2.31, body extent -1.5,-0.79 1.5,2.31, height 1.25
CON6_48.4_UJC-HP-3-SMT-TR [mm] "Type-C Connector"
  rect 0.7x1.15 smd: A5(-0.312,1.9) B5(0.688,1.9)
  rect 0.8x1.15 smd: A9(1.708,1.9) B9(-1.332,1.9)
  rect 0.9x1.15 smd: A12(2.938,1.9) B12(-2.562,1.9)
  rrect50% 1x2 hole 1.5 slot 0.5 at 0 deg unplated: E1(-4.132,1.9) E2(4.508,1.9) E3(4.508,-1.9) E4(-4.132,-1.9)
  silkscreen extent -4.28,-4.5 4.66,0.73, body extent -4.27,-4.5 4.67,2.3, height 3.42
CON24_19.64_U262-241N-4BV64_TH_RA [mm] "Type C Connector"
  rect 0.3x1 smd mask+0.076: A1(-2.625,2.625) A2(-2.125,2.625) A3(-1.625,2.625) A4(-1.125,2.625) A5(-0.625,2.625) A6(-0.125,2.625) A7(0.375,2.625) A8(0.875,2.625) A9(1.375,2.625) A10(1.875,2.625) A11(2.375,2.625) A12(2.875,2.625) B1(2.625,1.275) B2(2.125,1.275) B3(1.625,1.275) B4(1.125,1.275) B5(0.625,1.275) B6(0.125,1.275) B7(-0.375,1.275) B8(-0.875,1.275) B9(-1.375,1.275) B10(-1.875,1.275) B11(-2.375,1.275) B12(-2.875,1.275)
  oval 1x2.199 hole 0.6 slot 1.6 at 90 deg: S1(-4.32,1.925) S2(4.32,1.925)
  oval 1.499x1 hole 0.6 slot 1.2 at 0 deg: S1(-4.064,1.445) S2(4.064,1.445)
  oval 1.2x2.4 hole 0.6 slot 1.9 at 90 deg: S3(-4.32,-2.625) S4(4.32,-2.625)
  round 0.5 hole 0.5 unplated: ""(-3.4,0.575) ""(3.4,0.575)
  silkscreen extent -4.5,-5.33 4.5,2.67, body extent -6.06,-7.1 6.29,3.6, height 3.35
CSP20_15.7_100x84_SMD [mm] "CSP Package"
  round 0.25 smd mask+0.076: A1(-0.6,0.8) A2(-0.2,0.8) A3(0.2,0.8) A4(0.6,0.8) B1(-0.6,0.4) B2(-0.2,0.4) B3(0.2,0.4) B4(0.6,0.4) C1(-0.6,0) C2(-0.2,0) C3(0.2,0) C4(0.6,0) D1(-0.6,-0.4) D2(-0.2,-0.4) D3(0.2,-0.4) D4(0.6,-0.4) E1(-0.6,-0.8) E2(-0.2,-0.8) E3(0.2,-0.8) E4(0.6,-0.8)
  silkscreen extent -1.6,-1.3 1.1,1.3, body extent -1.12,-1.32 1.12,1.32, height 0.56
DFN-6_37.4_165_33X15_SMD [mm] "DFN Package"
  rect 0.84x0.4 smd mask+0.076: 1(-1.435,0.95) 2(-1.435,0) 3(-1.435,-0.95) 4(1.435,-0.95) 5(1.435,0) 6(1.435,0.95)
  rect 1.2x2.365 smd mask+0.076: 7(0,0)
  silkscreen extent -2.62,-1.5 2.08,1.5, body extent -1.5,-1.5 1.5,1.5, height 0.85
DIMM260_DDR4 [mm] "Dimm Module"
  rect 0.35x2.25 smd paste-0.75 mask+0.076: 1(-33.375,0) 3(-32.875,0) 5(-32.375,0) 7(-31.875,0) 9(-31.375,0) 11(-30.875,0) 13(-30.375,0) 15(-29.875,0) 17(-29.375,0) 19(-28.875,0) 21(-28.375,0) 23(-27.875,0) 25(-27.375,0) 27(-26.875,0) 29(-26.375,0) 31(-25.875,0) 33(-25.375,0) 35(-24.875,0) 37(-24.375,0) 39(-23.875,0) 41(-23.375,0) 43(-22.875,0) 45(-22.375,0) 47(-21.875,0) 49(-21.375,0) 51(-20.875,0) 53(-20.375,0) 55(-19.875,0) 57(-19.375,0) 59(-18.875,0) 61(-18.375,0) 63(-17.875,0) 65(-17.375,0) 67(-16.875,0) 69(-16.375,0) 71(-15.875,0) 73(-15.375,0) 75(-14.875,0) 77(-14.375,0) 79(-13.875,0) 81(-13.375,0) 83(-12.875,0) 85(-12.375,0) 87(-11.875,0) 89(-11.375,0) 91(-10.875,0) 93(-10.375,0) 95(-9.875,0) 97(-9.375,0) 99(-8.875,0) 101(-8.375,0) 103(-7.875,0) 105(-7.375,0) 107(-6.875,0) 109(-6.375,0) 111(-5.875,0) 113(-5.375,0) 115(-4.875,0) 117(-4.375,0) 119(-3.875,0) 121(-3.375,0) 123(-2.875,0) 125(-2.375,0) 127(-1.875,0) 129(-1.375,0) 131(-0.875,0) 133(-0.375,0) 135(0.125,0) 137(0.625,0) 139(1.125,0) 141(1.625,0) 143(2.125,0) 145(4.625,0) 147(5.125,0) 149(5.625,0) 151(6.125,0) 153(6.625,0) 155(7.125,0) 157(7.625,0) 159(8.125,0) 161(8.625,0) 163(9.125,0) 165(9.625,0) 167(10.125,0) 169(10.625,0) 171(11.125,0) 173(11.625,0) 175(12.125,0) 177(12.625,0) 179(13.125,0) 181(13.625,0) 183(14.125,0) 185(14.625,0) 187(15.125,0) 189(15.625,0) 191(16.125,0) 193(16.625,0) 195(17.125,0) 197(17.625,0) 199(18.125,0) 201(18.625,0) 203(19.125,0) 205(19.625,0) 207(20.125,0) 209(20.625,0) 211(21.125,0) 213(21.625,0) 215(22.125,0) 217(22.625,0) 219(23.125,0) 221(23.625,0) 223(24.125,0) 225(24.625,0) 227(25.125,0) 229(25.625,0) 231(26.125,0) 233(26.625,0) 235(27.125,0) 237(27.625,0) 239(28.125,0) 241(28.625,0) 243(29.125,0) 245(29.625,0) 247(30.125,0) 249(30.625,0) 251(31.125,0) 253(31.625,0) 255(32.125,0) 257(32.625,0) 259(33.125,0)
  rect 0.35x2.25 smd far side paste-0.75 mask+0.3: 2(-33.125,0) 4(-32.625,0) 6(-32.125,0) 8(-31.625,0) 10(-31.125,0) 12(-30.625,0) 14(-30.125,0) 16(-29.625,0) 18(-29.125,0) 20(-28.625,0) 22(-28.125,0) 24(-27.625,0) 26(-27.125,0) 28(-26.625,0) 30(-26.125,0) 32(-25.625,0) 34(-25.125,0) 36(-24.625,0) 38(-24.125,0) 40(-23.625,0) 42(-23.125,0) 44(-22.625,0) 46(-22.125,0) 48(-21.625,0) 50(-21.125,0) 52(-20.625,0) 54(-20.125,0) 56(-19.625,0) 58(-19.125,0) 60(-18.625,0) 62(-18.125,0) 64(-17.625,0) 66(-17.125,0) 68(-16.625,0) 70(-16.125,0) 72(-15.625,0) 74(-15.125,0) 76(-14.625,0) 78(-14.125,0) 80(-13.625,0) 82(-13.125,0) 84(-12.625,0) 86(-12.125,0) 88(-11.625,0) 90(-11.125,0) 92(-10.625,0) 94(-10.125,0) 96(-9.625,0) 98(-9.125,0) 100(-8.625,0) 102(-8.125,0) 104(-7.625,0) 106(-7.125,0) 108(-6.625,0) 110(-6.125,0) 112(-5.625,0) 114(-5.125,0) 116(-4.625,0) 118(-4.125,0) 120(-3.625,0) 122(-3.125,0) 124(-2.625,0) 126(-2.125,0) 128(-1.625,0) 130(-1.125,0) 132(-0.625,0) 134(-0.125,0) 136(0.375,0) 138(0.875,0) 140(1.375,0) 142(1.875,0) 144(2.375,0) 146(4.875,0) 148(5.375,0) 150(5.875,0) 152(6.375,0) 154(6.875,0) 156(7.375,0) 158(7.875,0) 160(8.375,0) 162(8.875,0) 164(9.375,0) 166(9.875,0) 168(10.375,0) 170(10.875,0) 172(11.375,0) 174(11.875,0) 176(12.375,0) 178(12.875,0) 180(13.375,0) 182(13.875,0) 184(14.375,0) 186(14.875,0) 188(15.375,0) 190(15.875,0) 192(16.375,0) 194(16.875,0) 196(17.375,0) 198(17.875,0) 200(18.375,0) 202(18.875,0) 204(19.375,0) 206(19.875,0) 208(20.375,0) 210(20.875,0) 212(21.375,0) 214(21.875,0) 216(22.375,0) 218(22.875,0) 220(23.375,0) 222(23.875,0) 224(24.375,0) 226(24.875,0) 228(25.375,0) 230(25.875,0) 232(26.375,0) 234(26.875,0) 236(27.375,0) 238(27.875,0) 240(28.375,0) 242(28.875,0) 244(29.375,0) 246(29.875,0) 248(30.375,0) 250(30.875,0) 252(31.375,0) 254(31.875,0) 256(32.375,0) 258(32.875,0) 260(33.375,0)
  silkscreen extent -34.81,-1.38 34.81,3.18
DIO_0402_SMD [mm] "Diode"
  rect 0.6x0.5 smd: A(0.521,0) K(-0.521,0)
  silkscreen extent -1.31,-0.48 1.03,0.46, body extent -0.67,-0.25 0.67,0.25, height 0.36
DIO_SOD523 [mm] "DIODE"
  rect 1x0.49 smd: A(0.85,0) K(-0.85,0)
  silkscreen extent -1.75,-0.63 1.6,0.62, body extent -0.85,-0.45 0.85,0.45, height 0.8
DIO_SOT-323-3 [mm] "SOT Package"
  rrect13% 1.15x0.5 smd: A1(-0.98,0.65) A2(-0.98,-0.65) K(0.98,0)
  silkscreen extent -1.24,-1.11 0.68,1.5, body extent -1.12,-1.1 1.12,1.1, height 1.11
FBGA200_SMD [mm]
  round 0.32 smd: A1(-4.4,6.825) A2(-3.6,6.825) A3(-2.8,6.825) A4(-2,6.825) A5(-1.2,6.825) A8(1.2,6.825) A9(2,6.825) A10(2.8,6.825) A11(3.6,6.825) A12(4.4,6.825) AA1(-4.4,-6.175) AA2(-3.6,-6.175) AA3(-2.8,-6.175) AA4(-2,-6.175) AA5(-1.2,-6.175) AA8(1.2,-6.175) AA9(2,-6.175) AA10(2.8,-6.175) AA11(3.6,-6.175) AA12(4.4,-6.175) AB1(-4.4,-6.825) AB2(-3.6,-6.825) AB3(-2.8,-6.825) AB4(-2,-6.825) AB5(-1.2,-6.825) AB8(1.2,-6.825) AB9(2,-6.825) AB10(2.8,-6.825) AB11(3.6,-6.825) AB12(4.4,-6.825) B1(-4.4,6.175) B2(-3.6,6.175) B3(-2.8,6.175) B4(-2,6.175) B5(-1.2,6.175) B8(1.2,6.175) B9(2,6.175) B10(2.8,6.175) B11(3.6,6.175) B12(4.4,6.175) C1(-4.4,5.525) C2(-3.6,5.525) C3(-2.8,5.525) C4(-2,5.525) C5(-1.2,5.525) C8(1.2,5.525) C9(2,5.525) C10(2.8,5.525) C11(3.6,5.525) C12(4.4,5.525) D1(-4.4,4.875) D2(-3.6,4.875) D3(-2.8,4.875) D4(-2,4.875) D5(-1.2,4.875) D8(1.2,4.875) D9(2,4.875) D10(2.8,4.875) D11(3.6,4.875) D12(4.4,4.875) E1(-4.4,4.225) E2(-3.6,4.225) E3(-2.8,4.225) E4(-2,4.225) E5(-1.2,4.225) E8(1.2,4.225) E9(2,4.225) E10(2.8,4.225) E11(3.6,4.225) E12(4.4,4.225) F1(-4.4,3.575) F2(-3.6,3.575) F3(-2.8,3.575) F4(-2,3.575) F5(-1.2,3.575) F8(1.2,3.575) F9(2,3.575) F10(2.8,3.575) F11(3.6,3.575) F12(4.4,3.575) G1(-4.4,2.925) G2(-3.6,2.925) G3(-2.8,2.925) G4(-2,2.925) G5(-1.2,2.925) G8(1.2,2.925) G9(2,2.925) G10(2.8,2.925) G11(3.6,2.925) G12(4.4,2.925) H1(-4.4,2.275) H2(-3.6,2.275) H3(-2.8,2.275) H4(-2,2.275) H5(-1.2,2.275) H8(1.2,2.275) H9(2,2.275) H10(2.8,2.275) H11(3.6,2.275) H12(4.4,2.275) J1(-4.4,1.625) J2(-3.6,1.625) J3(-2.8,1.625) J4(-2,1.625) J5(-1.2,1.625) J8(1.2,1.625) J9(2,1.625) J10(2.8,1.625) J11(3.6,1.625) J12(4.4,1.625) K1(-4.4,0.975) K2(-3.6,0.975) K3(-2.8,0.975) K4(-2,0.975) K5(-1.2,0.975) K8(1.2,0.975) K9(2,0.975) K10(2.8,0.975) K11(3.6,0.975) K12(4.4,0.975) N1(-4.4,-0.975) N2(-3.6,-0.975) N3(-2.8,-0.975) N4(-2,-0.975) N5(-1.2,-0.975) N8(1.2,-0.975) N9(2,-0.975) N10(2.8,-0.975) N11(3.6,-0.975) N12(4.4,-0.975) P1(-4.4,-1.625) P2(-3.6,-1.625) P3(-2.8,-1.625) P4(-2,-1.625) P5(-1.2,-1.625) P8(1.2,-1.625) P9(2,-1.625) P10(2.8,-1.625) P11(3.6,-1.625) P12(4.4,-1.625) R1(-4.4,-2.275) R2(-3.6,-2.275) R3(-2.8,-2.275) R4(-2,-2.275) R5(-1.2,-2.275) R8(1.2,-2.275) R9(2,-2.275) R10(2.8,-2.275) R11(3.6,-2.275) R12(4.4,-2.275) T1(-4.4,-2.925) T2(-3.6,-2.925) T3(-2.8,-2.925) T4(-2,-2.925) T5(-1.2,-2.925) T8(1.2,-2.925) T9(2,-2.925) T10(2.8,-2.925) T11(3.6,-2.925) T12(4.4,-2.925) U1(-4.4,-3.575) U2(-3.6,-3.575) U3(-2.8,-3.575) U4(-2,-3.575) U5(-1.2,-3.575) U8(1.2,-3.575) U9(2,-3.575) U10(2.8,-3.575) U11(3.6,-3.575) U12(4.4,-3.575) V1(-4.4,-4.225) V2(-3.6,-4.225) V3(-2.8,-4.225) V4(-2,-4.225) V5(-1.2,-4.225) V8(1.2,-4.225) V9(2,-4.225) V10(2.8,-4.225) V11(3.6,-4.225) V12(4.4,-4.225) W1(-4.4,-4.875) W2(-3.6,-4.875) W3(-2.8,-4.875) W4(-2,-4.875) W5(-1.2,-4.875) W8(1.2,-4.875) W9(2,-4.875) W10(2.8,-4.875) W11(3.6,-4.875) W12(4.4,-4.875) Y1(-4.4,-5.525) Y2(-3.6,-5.525) Y3(-2.8,-5.525) Y4(-2,-5.525) Y5(-1.2,-5.525) Y8(1.2,-5.525) Y9(2,-5.525) Y10(2.8,-5.525) Y11(3.6,-5.525) Y12(4.4,-5.525)
  silkscreen extent -5.05,-7.87 5.05,7.9, body extent -4.53,-7.72 4.47,7.78, height 1.2